# Altium PCB L-LRMAM36-FANN4-DK01_V03_位号图.PcbDoc (part 1 of 3)
Units mm, origin at the board's own origin, x right, y up, seen from the top; angles counter-clockwise.
Board outline 54 x 90 mm, 4 copper layers (Top Layer, GND, VCC, Bottom Layer), stack 1.59 mm thick; 276 components, 168 nets, 833 pads, 804 vias.
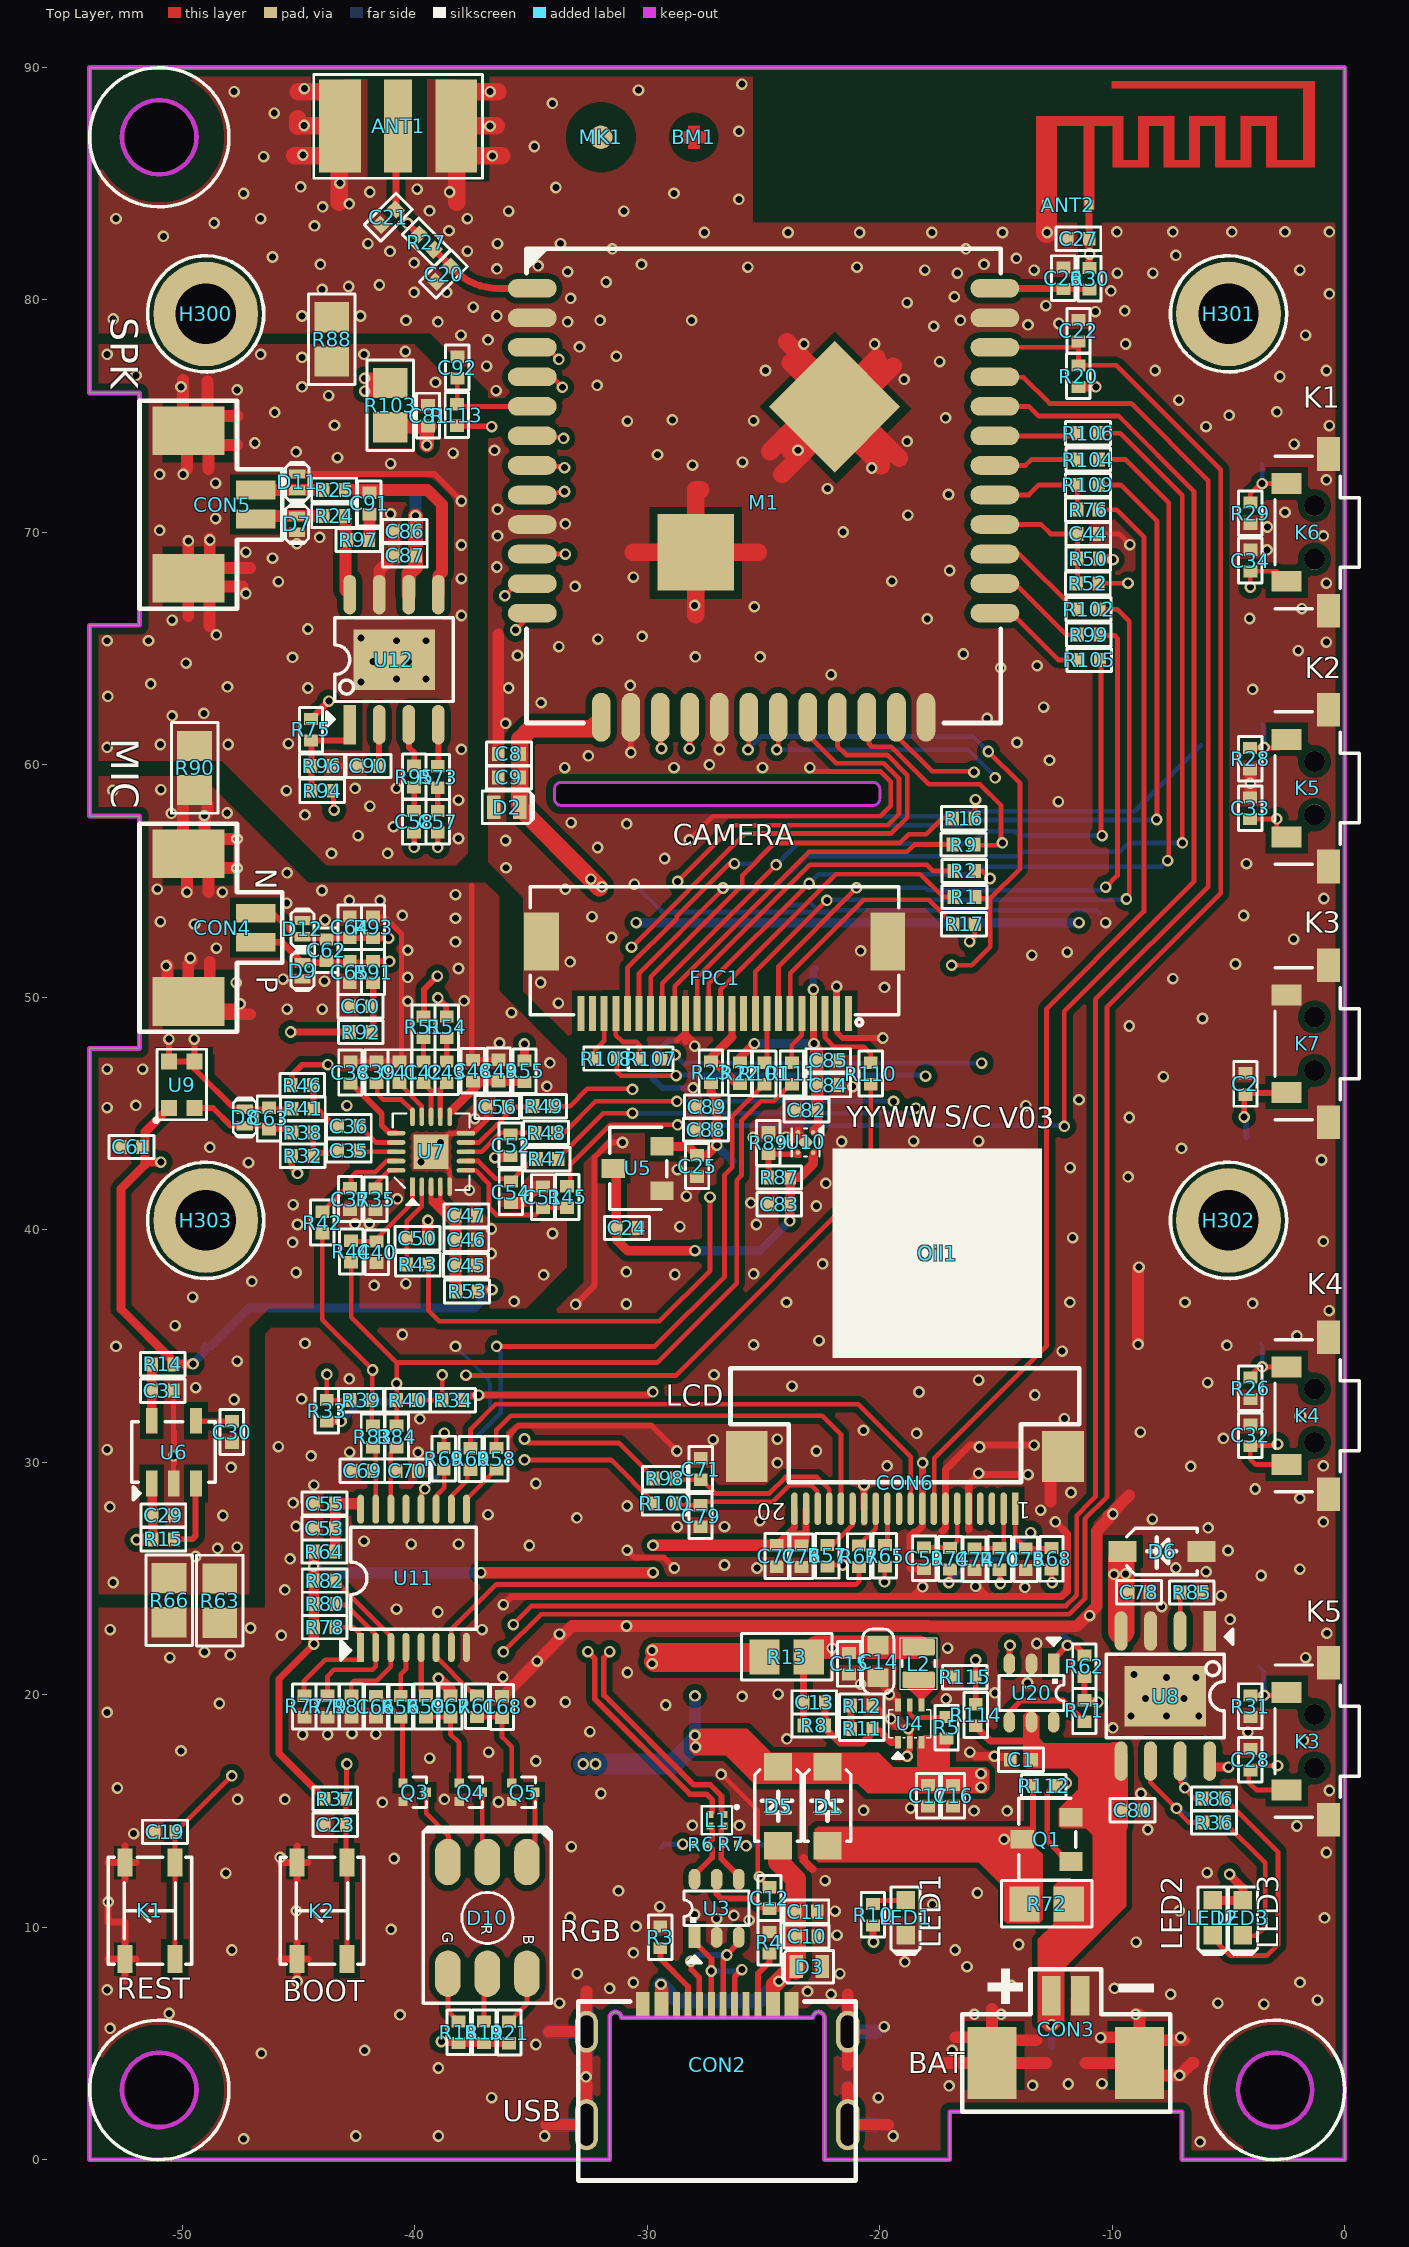
[diagram p0: Top Layer view]
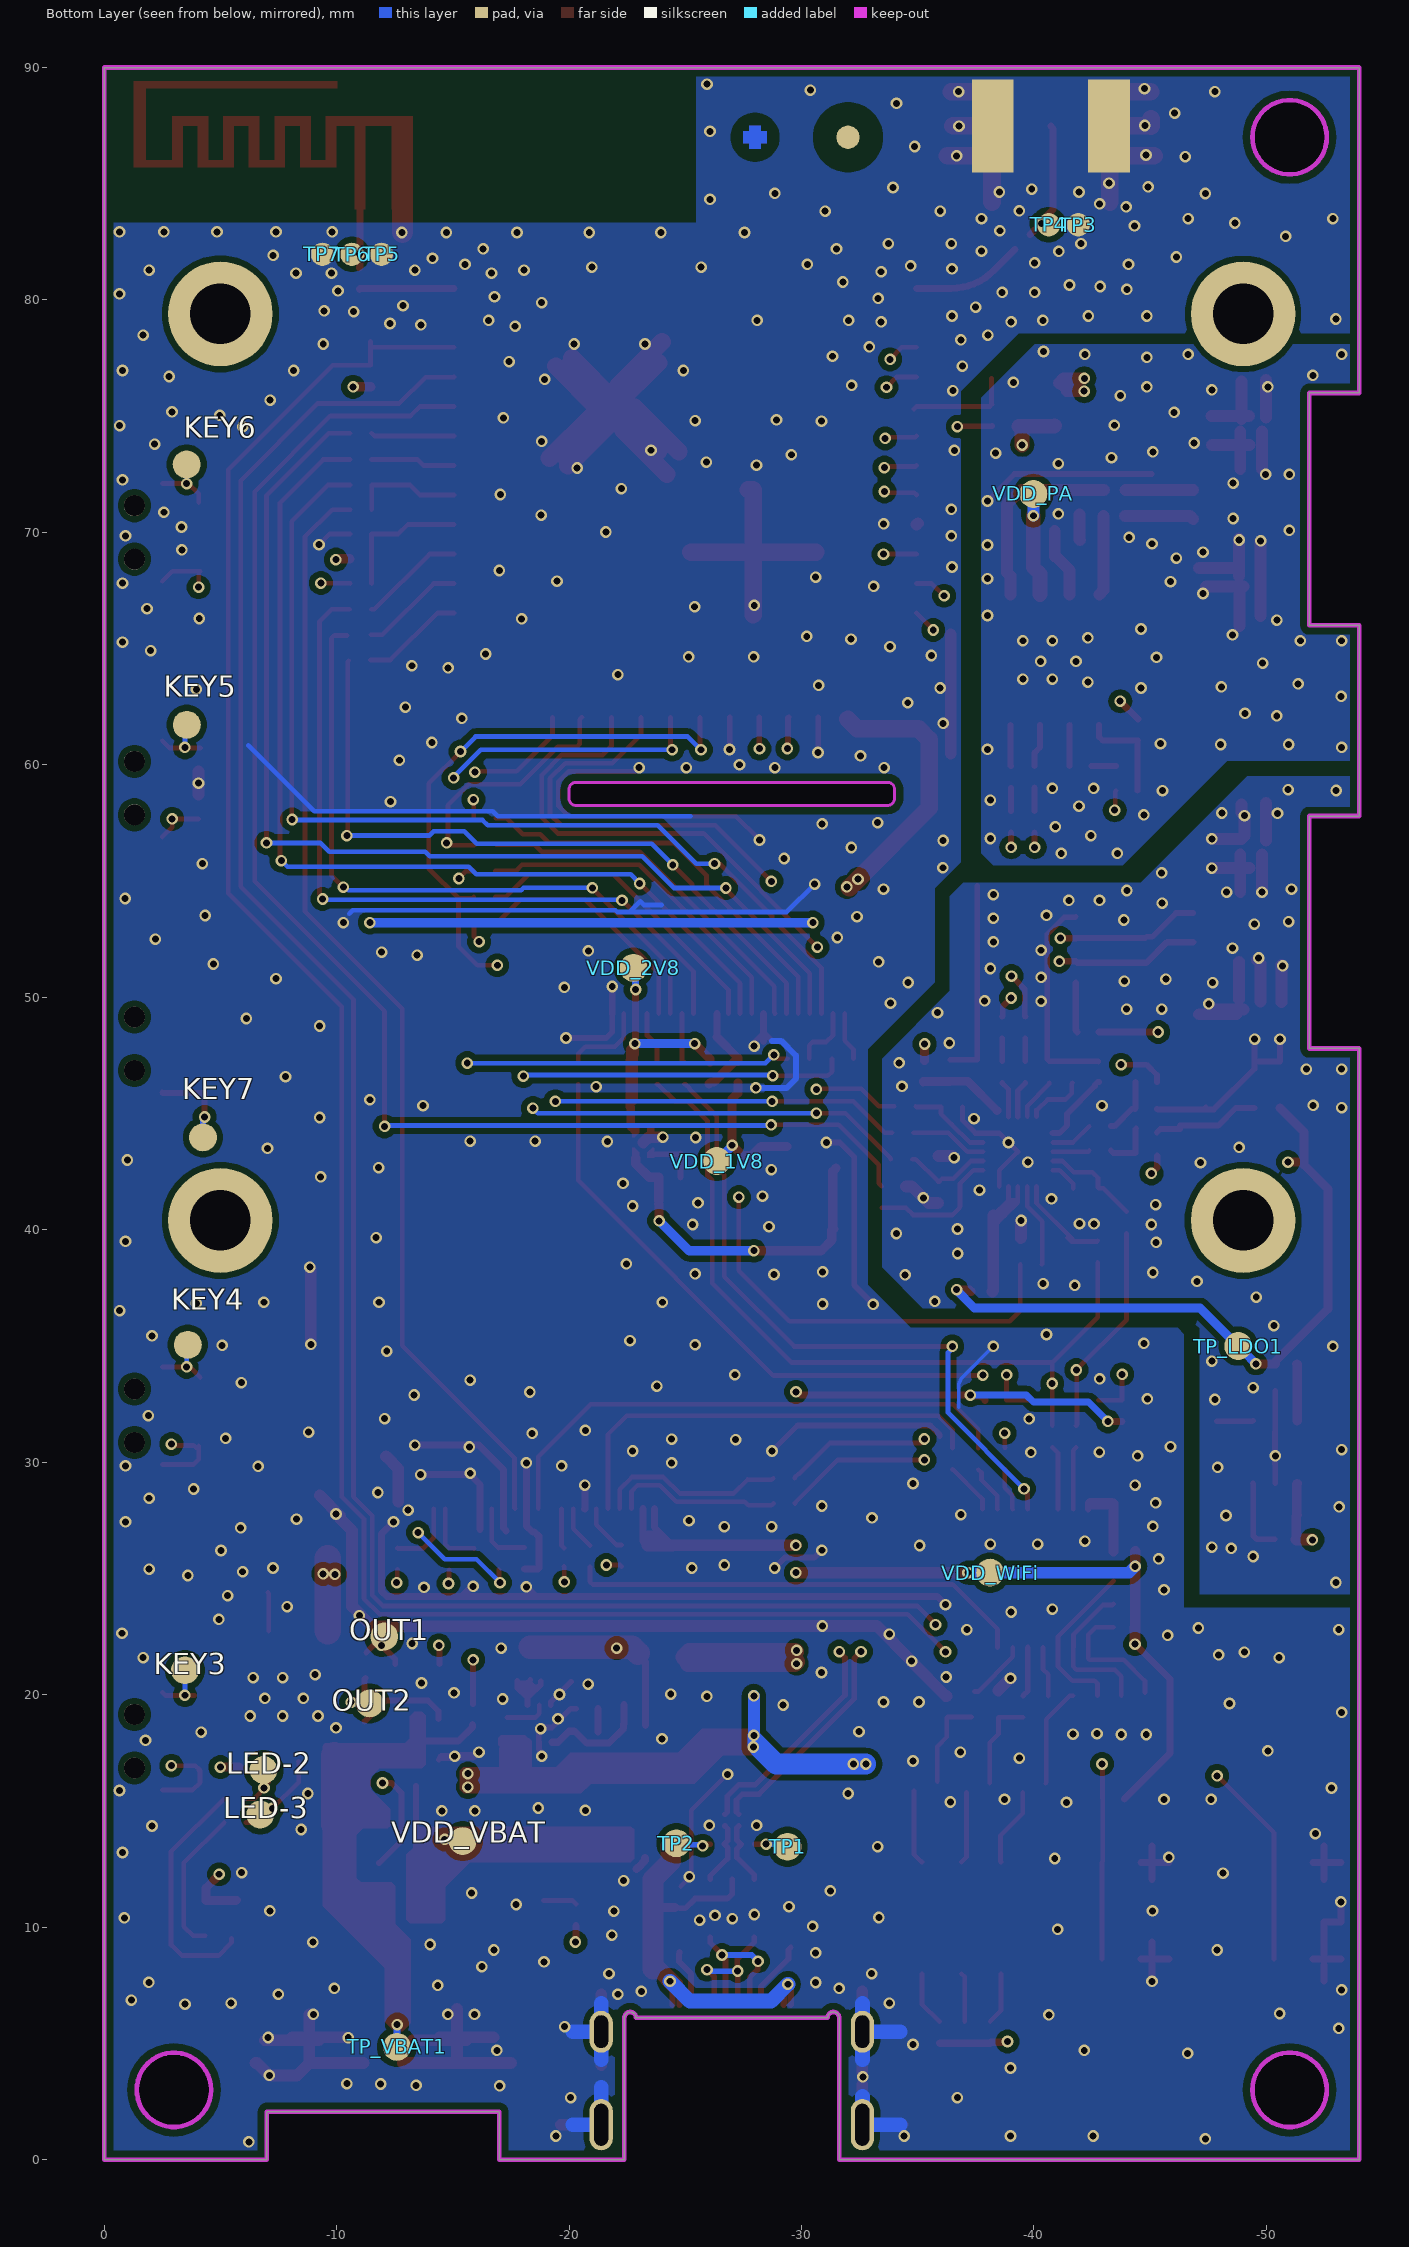
[diagram p1: Bottom Layer view, seen from below]
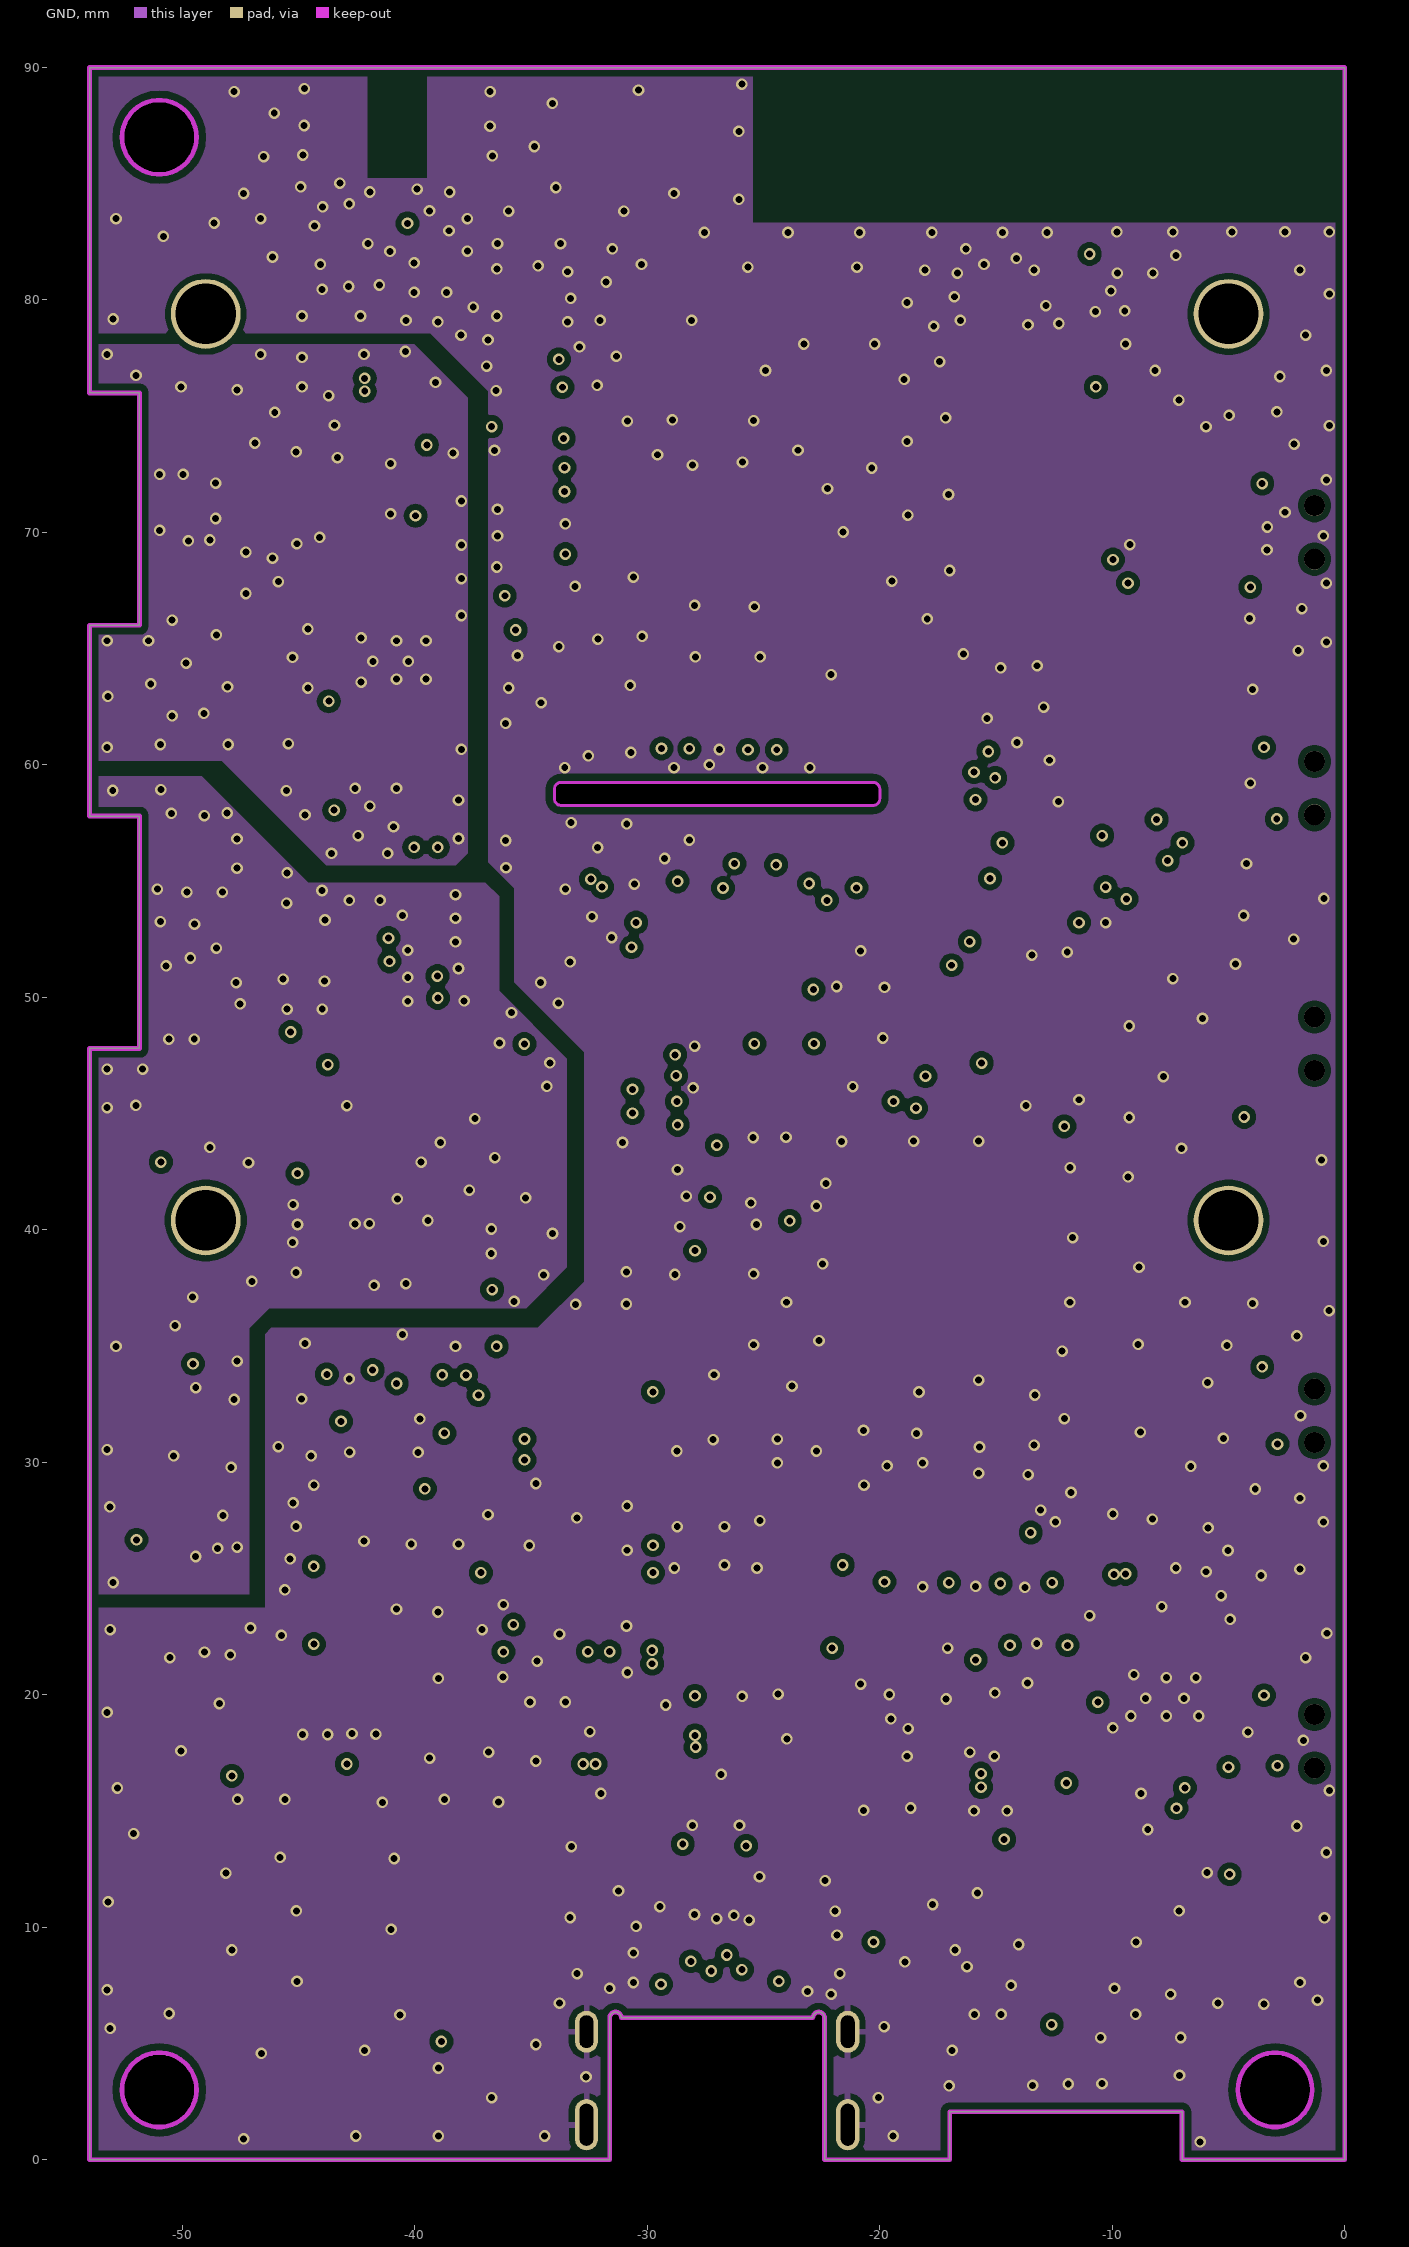
[diagram p2: GND]
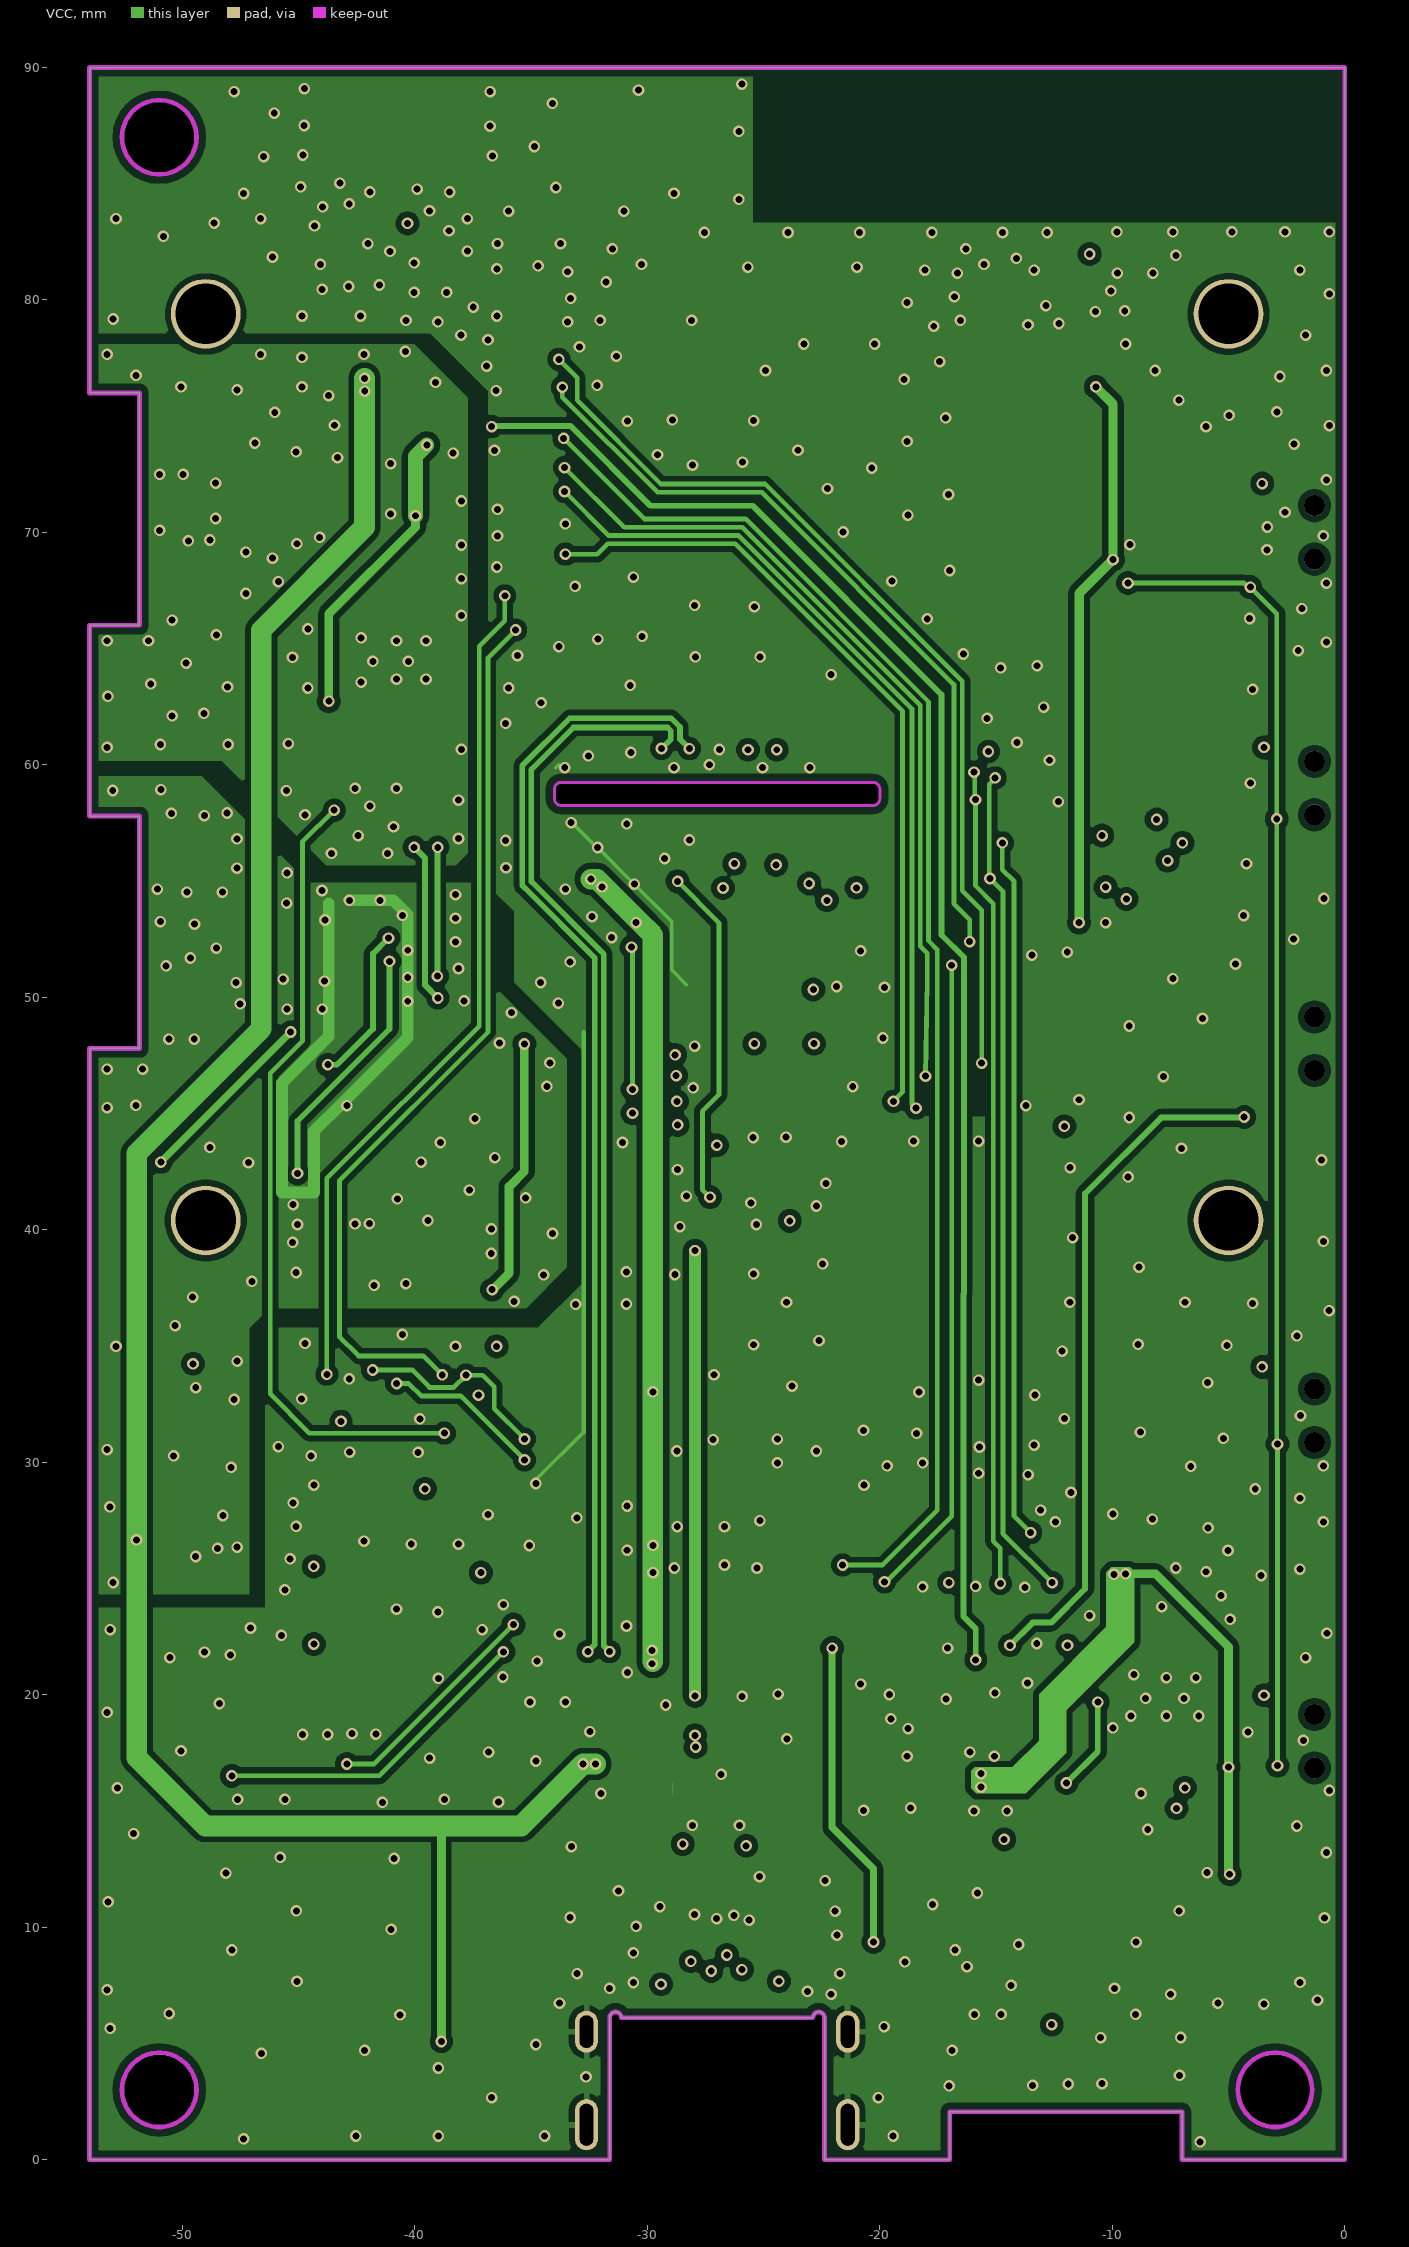
[diagram p3: VCC]
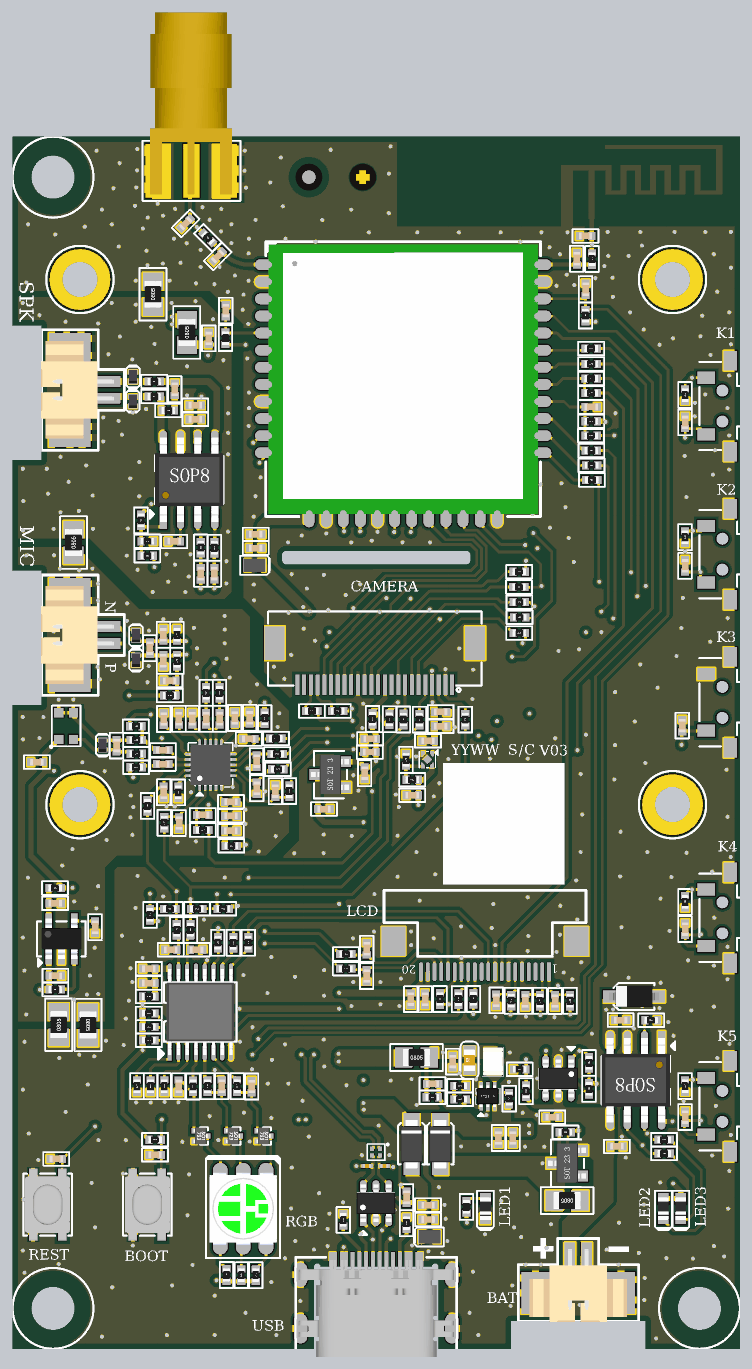
[diagram p6: 3D render of the assembled board from above, using the file's embedded part models]

## Layer stack, top to bottom
Top Solder: solder mask 0.0102, Solder Resist, Dk 3.5
Top Layer: signal copper 0.035
Dielectric 2: prepreg 0.21, PP-006, Dk 4.1
GND: signal copper 0.018
Dielectric 1: dielectric 1.064, FR-4, Dk 4.8
VCC: signal copper 0.018
Dielectric 3: prepreg 0.21, PP-006, Dk 4.1
Bottom Layer: signal copper 0.035
Bottom Solder: solder mask 0.0102, Solder Resist, Dk 3.5

## Board outline
-54,47.8 -51.85,47.8 -51.85,57.8 -54,57.8 -54,66 -51.85,66 -51.85,76 -54,76 -54,90 0,90 0,0 -7,0 -7,2.05 -17,2.05 -17,0 -22.38,0 -22.38,6.1 ccw(c-22.63,6.1) -22.88,6.1 -31.12,6.1 ccw(c-31.37,6.1) -31.62,6.1 -31.62,0 -54,0
cut-out: -33.7,58.25 cw(c-33.7,58.55) -34,58.55 -34,58.95 cw(c-33.7,58.95) -33.7,59.25 -20.3,59.25 cw(c-20.3,58.95) -20,58.95 -20,58.55 cw(c-20.3,58.55) -20.3,58.25
cut-out: -3,1.4 ccw(c-3,3) -1.4,3 ccw(c-3,3) -3,4.6 ccw(c-3,3) -4.6,3 ccw(c-3,3)
cut-out: -51,85.4 cw(c-51,87) -52.6,87 cw(c-51,87) -51,88.6 cw(c-51,87) -49.4,87 cw(c-51,87)
cut-out: -51,1.4 cw(c-51,3) -52.6,3 cw(c-51,3) -51,4.6 cw(c-51,3) -49.4,3 cw(c-51,3)

## Design rules (kind name [scope] priority, off if disabled: settings)
Clearance Clearance_via [IsVia vs IsVia] p1: gap=0.4 ignorepadtopadclearanceinfootprint=FALSE
Clearance Clearance_keepout [IsKeepOut] p2: gap=0.3 ignorepadtopadclearanceinfootprint=FALSE
Clearance Clearance_polygon [InPolygon] p3: gap=0.254 ignorepadtopadclearanceinfootprint=FALSE
Clearance Clearance_1 [InComponent('U10') or InComponent('K1')or InComponent('K2')] p4: gap=0.152 ignorepadtopadclearanceinfootprint=FALSE
Clearance [All] p5: gap=0.152 ignorepadtopadclearanceinfootprint=FALSE except(0.203: Arc-Fill Arc-Poly Arc-Region Track-Fill Track-Poly Track-Region SMDPad-Fill SMDPad-Poly SMDPad-Region THPad-Fill THPad-Poly THPad-Region Via-Fill Via-Poly Via-Region Fill-Fill Fill-Poly Fill-Region Poly-Poly Poly-Region Region-Region)
ComponentClearance [All] p1 off: gap=0.254 collisioncheckmode=3 verticalgap=0.254 showdistances=FALSE
DiffPairsRouting [All] p1: maxlimit=0.254 minlimit=0.152 mostfreqgap=0.254 toplayer_minwidth=0.241 toplayer_maxwidth=0.381 toplayer_prefwidth=0.381 midlayer1_minwidth=0.191 midlayer1_maxwidth=0.381 midlayer1_prefwidth=0.381 midlayer2_minwidth=0.191 midlayer2_maxwidth=0.381 midlayer2_prefwidth=0.381 bottomlayer_minwidth=0.241 bottomlayer_maxwidth=0.381 bottomlayer_prefwidth=0.381 maxuncoupledlength=12.7
Height [All] p1 off: minheight=0 maxheight=25.4 prefheight=12.7
HoleSize [All] p1: absolutevalues=TRUE maxlimit=5 minlimit=0.025 maxpercent=80.000 minpercent=20.000
HoleToHoleClearance [All] p1: gap=0.05 allowstackedmicrovias=TRUE
LayerPairs [All] p1 off: enforce=TRUE
MinimumSolderMaskSliver [All] p1 off: minsoldermaskwidth=0
PolygonConnect [All] p1: thpad.connectstyle=Relief thpad.reliefconductorwidth=0.254 thpad.reliefentries=4 thpad.polygonreliefangle="90 Angle" thpad.airgapwidth=0.254 smdpad.connectstyle=Direct smdpad.reliefconductorwidth=0.254 smdpad.reliefentries=4 smdpad.polygonreliefangle="90 Angle" smdpad.airgapwidth=0.254 via.connectstyle=Direct via.reliefconductorwidth=0.254 via.reliefentries=4 via.polygonreliefangle="90 Angle" via.airgapwidth=0.254
RoutingVias [All] p1: holewidth=0.3 width=0.5 viastyle="Through Hole" minholewidth=0.3 minwidth=0.5 maxholewidth=3 maxwidth=5
SilkToSilkClearance [All] p1 off: silktosilkclearance=0
SilkToSolderMaskClearance [IsPad] p1 off: minsilkscreentomaskgap=0 clearancetoexposedcopper=TRUE
SolderMaskExpansion [All] p1: expansion=0.102 istentingtop=FALSE
SupplyNets "Schematic Supply Nets_9" [InNet('VDD_VBAT')] p1: voltage=0.000
SupplyNets "Schematic Supply Nets_14" [InNet('VCC_IO')] p2: voltage=0.000
SupplyNets "Schematic Supply Nets_13" [InNet('VCC_1V8')] p3: voltage=0.000
SupplyNets "Schematic Supply Nets_11" [InNet('3.3V_8311')] p4: voltage=0.000
SupplyNets "Schematic Supply Nets_10" [InNet('PAGND')] p5: voltage=0.000
SupplyNets "Schematic Supply Nets_8" [InNet('VCC_2V8')] p6: voltage=0.000
SupplyNets "Schematic Supply Nets_7" [InNet('VBAT_Li')] p7: voltage=0.000
SupplyNets "Schematic Supply Nets_6" [InNet('GND')] p8: voltage=0.000
SupplyNets "Schematic Supply Nets_5" [InNet('VDD_PA')] p9: voltage=0.000
SupplyNets "Schematic Supply Nets_4" [InNet('V3P3')] p10: voltage=0.000
SupplyNets "Schematic Supply Nets_3" [InNet('MIC_N')] p11: voltage=0.000
SupplyNets "Schematic Supply Nets_2" [InNet('VDD_3V3')] p12: voltage=0.000
SupplyNets "Schematic Supply Nets_1" [InNet('V5P0')] p13: voltage=0.000
SupplyNets "Schematic Supply Nets" [InNet('VBUS2')] p14: voltage=0.000
UnRoutedNet [All] p1: checkbadconnections=TRUE
Width [All] p1: maxlimit=3.81 minlimit=0.152 preferedwidth=0.254
20 further rules are at their usual default settings.

## Classes and differential pairs
component class 06_LCD&Camera_interface: C59 C71 C74 C75 C76 C77 C79 C84 C85 C88 C89 CON6 FPC1 R22 R23 R98 R100 R110 R111
component class 05_Codec&PA: C35 C36 C37 C38 C39 C40 C41 C42 C43 C44 C45 C46 C47 C48 C49 C50 C51 C52 C53 C54 C55 C56 C57 C58 C60 C61 C62 C63 C64 C65 C69 C70 C86 C87 C90 C91 C92 CON4 CON5 D7 D8 D9 D11 D12 R1 R2 R9 R16 R17 R24 R25 R32 R33 R34 R35 R38 R39 R40 R41 R42 R43 R44 R45 R46 R47 R48 R49 R50 R51 R52 R53 R54 R55 R57 R58 R60 R63 R64 R65 R66 R67 R68 R69 R70 R73 R74 R75 R76 R77 R78 R79 R80 R81 R82 R83 R84 R88 R90 R91 R92 R93 R94 R95 R96 R97 R99 R101 R102 R104 R105 R106 R107 R108 R109 R113 U7 U9 U11 U12
component class 04_Function_260316_V02: ANT1 ANT2 BM1 C2 C8 C9 C19 C20 C21 C22 C23 C26 C27 C28 C32 C33 C34 C66 C67 C68 D2 D10 K1 K2 K3 K4 K5 K6 K7 KEY3 KEY4 KEY5 KEY6 KEY7 L1 M1 MK1 Oil1 Q3 Q4 Q5 R6 R7 R18 R19 R20 R21 R26 R27 R28 R29 R30 R31 R37 R56 R59 R61 TP1 TP2 TP3 TP4 TP5 TP6 TP7
component class 03_Power_260316_V02: C1 C10 C11 C12 C13 C14 C15 C16 C17 C24 C25 C29 C30 C31 C78 C80 C81 C82 C83 CON2 CON3 D1 D3 D5 D6 H300 H301 H302 H303 L2 LED1 LED2 LED3 LED-2 LED-3 OUT1 OUT2 Q1 R3 R4 R5 R8 R10 R11 R12 R13 R14 R15 R36 R62 R71 R72 R85 R86 R87 R89 R103 R112 R114 R115 TP_LDO1 TP_VBAT1 U3 U4 U5 U6 U8 U10 U20 VDD_1V8 VDD_2V8 VDD_PA VDD_VBAT VDD_WiFi
differential pair USB2: +USB2_P -USB2_N
differential pair D2: +D2_P -D2_N
differential pair AM36_USBD: +AM36_USBD_P -AM36_USBD_N

## Components (designator, comment, footprint, x,y, rotation, side; value= is the part's Value field where it differs from the comment)
ANT1 "ANT P5" SMA-SMD -40.725,87.475 r0 top
ANT2 "ANT 2P" 2.4G_5.5X12 -11,84.1 r0 top locked
BM1 "BadMARK" "Bad Mark" -28,87 r0 top
C1 "2.2uF" 0402C_0.4D -13.925,17.2 r0 top
C2 "NC" 0402C_0.4D -4.275,46.275 r270 top
C8 "10uF/16V" 0402C_0.4D -35.955,60.475 r0 top value=0.1uF
C9 "0.1uF/16V" 0402C_0.4D -35.955,59.459 r0 top
C10 "4.7uF/16V" 0402C_0.4D -23.15,9.6 r180 top
C11 "0.1uF/16V" 0402C_0.4D -23.159,10.668 r180 top
C12 "0.1uF" 0402C_0.4D -24.75,11.25 r270 top
C13 "20pF" 0402C_0.4D -22.821,19.67 r180 top
C14 "22uF" 0603C_0.6D -20.075,21.425 r90 top
C15 "10uF/10V" 0402C_0.4D -21.325,21.325 r90 top
C16 "4.7uF/16V" 0402C_0.4D -16.85,15.65 r90 top
C17 "1uF/16V" 0402C_0.4D -17.925,15.65 r90 top
C19 "100pF" 0402C_0.4D -50.755,14.097 r0 top
C20 "NC" 0402C_0.4D -38.768,81.11 r45 top
C21 "NC" 0402C_0.4D -41.147,83.561 r45 top
C22 "1uF/16V" 0402C_0.4D -11.456,78.676 r270 top
C23 "100pF" 0402C_0.4D -43.425,14.4 r0 top
C24 "1uF/16V" 0402C_0.4D -30.88,40.077 r180 top
C25 "1uF/16V" 0402C_0.4D -27.86,42.74 r90 top
C26 "NC" 0402C_0.4D -12.108,80.94 r270 top
C27 "NC" 0402C_0.4D -11.458,82.633 r0 top
C28 "100pF" 0402C_0.4D -4.064,17.201 r270 top
C29 "1uF/16V" 0402C_0.4D -50.822,27.709 r180 top
C30 "10nF" 0402C_0.4D -47.879,31.299 r90 top
C31 "1uF/16V" 0402C_0.4D -50.845,33.078 r180 top
C32 "100pF" 0402C_0.4D -4.064,31.162 r270 top
C33 "100pF" 0402C_0.4D -4.068,58.137 r270 top
C34 "100pF" 0402C_0.4D -4.064,68.788 r270 top
C35 "2.2uF/10V" 0402C_0.4D -42.843,43.407 r180 top
C36 "2.2uF/10V" 0402C_0.4D -42.843,44.457 r180 top
C37 "22pF" 0402C_0.4D -42.786,41.323 r90 top
C38 "1uF/16V" 0402C_0.4D -42.778,46.763 r270 top
C39 "1uF/16V" 0402C_0.4D -41.656,46.782 r270 top
C40 "22pF" 0402C_0.4D -41.645,39.036 r90 top
C41 "1uF/16V" 0402C_0.4D -40.656,46.782 r270 top
C42 "1uF/16V" 0402C_0.4D -39.631,46.782 r270 top
C43 "1uF/16V" 0402C_0.4D -38.631,46.782 r270 top
C44 "0.1uF/16V" 0402C_0.4D -11.037,69.933 r0 top
C45 "2.2uF" 0402C_0.4D -37.802,38.473 r180 top
C46 "0.1uF" 0402C_0.4D -37.786,39.576 r180 top
C47 "0.1uF" 0402C_0.4D -37.789,40.615 r180 top
C48 "0.1uF/16V" 0402C_0.4D -37.507,46.837 r270 top
C49 "2.2uF/10V" 0402C_0.4D -36.4,46.85 r270 top
C50 "NC" 0402C_0.4D -39.891,39.638 r180 top
C51 "NC" 0402C_0.4D -34.492,41.405 r270 top
C52 "NC" 0402C_0.4D -35.886,43.635 r90 top
C53 "2.2uF/10V" 0402C_0.4D -43.891,27.158 r0 top
C54 "NC" 0402C_0.4D -35.873,41.615 r90 top
C55 "0.1uF/16V" 0402C_0.4D -43.887,28.223 r0 top
C56 "NC" 0402C_0.4D -36.461,45.283 r0 top
C57 "0.47uF" 0402C_0.4D -39.019,57.552 r90 top
C58 "0.47uF" 0402C_0.4D -40.032,57.546 r90 top
C59 "NC" 0402C_0.4D -18.094,25.871 r270 top
C60 "0.1uF/16V" 0402C_0.4D -42.343,49.615 r180 top
C61 "0.1uF/16V" 0402C_0.4D -52.197,43.561 r0 top
C62 "33pF" 0402C_0.4D -43.811,52.025 r270 top
C63 "15pF" 0402C_0.4D -46.283,44.789 r270 top
C64 "1nF" 0402C_0.4D -42.803,53.012 r270 top
C65 "1nF" 0402C_0.4D -42.803,51.087 r90 top
C66 "100pF" 0402C_0.4D -41.676,19.485 r90 top
C67 "100pF" 0402C_0.4D -38.473,19.494 r270 top
C68 "100pF" 0402C_0.4D -36.252,19.472 r270 top
C69 "22pF" 0402C_0.4D -42.261,29.63 r180 top
C70 "22pF" 0402C_0.4D -40.336,29.63 r180 top
C71 "22pF" 0402C_0.4D -27.705,29.705 r90 top
C74 "NC" 0402C_0.4D -15.926,25.83 r270 top
C75 "NC" 0402C_0.4D -13.724,25.827 r270 top
C76 "1uF/16V" 0402C_0.4D -23.368,25.954 r270 top
C77 "1uF/16V" 0402C_0.4D -24.436,25.965 r270 top
C78 "CAP-NP" 0402C_0.4D -8.854,24.409 r180 top
C79 "22pF" 0402C_0.4D -27.713,27.683 r90 top
C80 "CAP-NP" 0402C_0.4D -9.128,15.028 r180 top
C81 "10uF/10V" 0402C_0.4D -39.436,75.024 r270 top
C82 "1uF/16V" 0402C_0.4D -23.156,45.142 r0 top
C83 "2.2uF" 0402C_0.4D -24.325,41.101 r0 top
C84 "1uF/16V" 0402C_0.4D -22.22,46.222 r0 top
C85 "0.1uF/16V" 0402C_0.4D -22.22,47.287 r180 top
C86 "10uF/10V" 0402C_0.4D -40.435,70.057 r180 top
C87 "0.1uF/16V" 0402C_0.4D -40.432,69.015 r180 top
C88 "1uF/16V" 0402C_0.4D -27.482,44.312 r180 top
C89 "0.1uF/16V" 0402C_0.4D -27.446,45.29 r0 top
C90 "1uF/16V" 0402C_0.4D -42,59.951 r180 top
C91 "1nF" 0402C_0.4D -41.961,71.246 r270 top
C92 "0.1uF/16V" 0402C_0.4D -38.176,77.091 r90 top
CON2 "USB-TYPE C-16" USB-TYPEC-U22401-1 -27,3 r0 top locked
CON3 "FPC-2" SMD-1.25-2P -12,5.6 r0 top
CON4 "FPC-2" SMD-1.25-2P -48.3,53 r270 top locked
CON5 "11-0672002-33C" SMD-1.25-2P -48.3,71.2 r270 top locked
CON6 "HW0520010-202R-001" FPC0.5E-20P -23.675,27.998 r0 top locked
D1 "DIODE-ZD" SOD-123-FL -22.25,15.2 r270 top
D2 "DIODE-TVS" UDFN2(1610) -36.056,58.178 r180 top
D3 "DIODE-TVS" UDFN2(1610) -23.043,8.301 r0 top
D5 "DIODE-ZD" SOD-123-FL -24.375,15.2 r270 top
D6 "DIODE-ZD" SOD-123 -7.854,26.162 r0 top
D7 "DIODE-2TVS" DFN1006-NP -45.077,70.358 r90 top
D8 "WS6183KF" DFN1006-NP -47.317,44.83 r90 top
D9 "DIODE-2TVS" DFN1006-NP -44.839,51.139 r90 top
D10 "MHP5050DRGBCT" D5050-RGB -36.882,10.4 r270 top locked
D11 "DIODE-2TVS" DFN1006-NP -45.063,72.161 r90 top
D12 "DIODE-2TVS" DFN1006-NP -44.839,52.957 r90 top
FPC1 "HW0520010-242R-001" FPC0.5-24P -27.108,52 r0 top locked
H300 "TP" M2.5 -49,79.4 r0 top
H301 "TP" M2.5 -5,79.4 r0 top
H302 "TP" M2.5 -5,40.4 r0 top locked
H303 "TP" M2.5 -49,40.4 r0 top locked
K1 "BUTTON-4" SW-4.2X3.2-4P-S -51.4,10.7 r90 top
K2 "BUTTON-4" SW-4.2X3.2-4P-S -44,10.7 r90 top
K3 "BUTTON-2-2" 1188E-1W3-V-T/R -1.6,18 r90 top locked
K4 "BUTTON-2-2" 1188E-1W3-V-T/R -1.6,32 r90 top locked
K5 "BUTTON-2-2" 1188E-1W3-V-T/R -1.6,59 r90 top
K6 "BUTTON-2-2" 1188E-1W3-V-T/R -1.6,70 r90 top
K7 "BUTTON-2-2" 1188E-1W3-V-T/R -1.6,48 r90 top
KEY3 "MARK" TEST#1 -3.475,21.05 r90 bottom
KEY4 "MARK" TEST#1 -3.6,35.05 r90 bottom
KEY5 "MARK" TEST#1 -3.556,61.722 r90 bottom
KEY6 "MARK" TEST#1 -3.55,72.925 r90 bottom
KEY7 "MARK" TEST#1 -4.25,43.975 r90 bottom
L1 "DLM0NSN900HY2D" L-0.85X0.65 -27.007,14.601 r270 top
L2 "2.2uH/20%/2.0*1.2*0.8/1.7A/146mΩ" 0805L_0.7D-NB -18.336,21.338 r90 top
LED1 "*" D0603 -18.893,10.4 r90 top
LED2 "红/25mA" D0603 -5.682,10.4 r90 top
LED3 "绿/25mA" D0603 -4.382,10.4 r90 top
LED-2 "MARK" TEST#1 -6.858,16.764 r90 bottom
LED-3 "MARK" TEST#1 -6.713,14.841 r90 bottom
M1 "L-LRMAM36-FANN4" L-LRMAM36-FANN4 -25,72 r0 top locked
MK1 "MARK" MARK -32,87 r0 top
Oil1 "Oil" "White oil-9X9" -17.526,38.989 r0 top
OUT1 "MARK" TEST#1 -12.05,22.5 r90 bottom
OUT2 "MARK" TEST#1 -11.425,19.625 r90 bottom
Q1 "P-MOS-D1" SOT-23-3G -12.825,13.775 r0 top
Q3 "NPN" SOT-723-3A -40.013,15.8 r180 top
Q4 "NPN" SOT-723-3A -37.6,15.8 r180 top
Q5 "NPN" SOT-723-3A -35.337,15.8 r180 top
R1 "0Ω/1%" 0402R_0.4D -16.359,54.315 r0 top
R2 "0Ω/1%" 0402R_0.4D -16.367,55.437 r0 top
R3 "5.1K/1%" 0402R_0.4D -29.446,9.566 r270 top
R4 "5.1K/1%" 0402R_0.4D -24.75,9.325 r270 top
R5 "51KΩ/1%" 0402R_0.4D -17.128,18.574 r270 top
R6 "RES-NBOM" 0201_0.25D -27.684,13.561 r180 top
R7 "RES-NBOM" 0201_0.25D -26.4,13.575 r180 top
R8 "100KΩ/1%" 0402R_0.4D -22.825,18.675 r180 top
R9 "0Ω/1%" 0402R_0.4D -16.401,56.571 r0 top
R10 "620R" 0402R_0.4D -20.299,10.535 r270 top
R11 "22KΩ" 0402R_0.4D -20.775,18.525 r0 top
R12 "220Ω/1%" 0402R_0.4D -20.775,19.525 r180 top
R13 "RES" 0805R_0.6D -24.007,21.625 r0 top
R14 "0Ω/1%" 0402R_0.4D -50.853,34.213 r0 top
R15 "10KΩ/5%" 0402R_0.4D -50.822,26.684 r180 top
R16 "0Ω/1%" 0402R_0.4D -16.388,57.7 r0 top
R17 "0Ω/1%" 0402R_0.4D -16.377,53.143 r0 top
R18 "620R" 0402R_0.4D -38.122,5.478 r270 top
R19 "620R" 0402R_0.4D -37.025,5.472 r270 top
R20 "10KΩ/5%" 0402R_0.4D -11.463,76.724 r270 top
R21 "620R" 0402R_0.4D -35.945,5.467 r270 top
R22 "0Ω/1%" 0402R_0.4D -26.022,46.738 r90 top
R23 "0Ω/1%" 0402R_0.4D -27.27,46.77 r270 top
R24 "1.5Ω/1%" 0402R_0.4D -43.477,70.71 r180 top
R25 "1.5Ω/1%" 0402R_0.4D -43.477,71.83 r180 top
R26 "27KΩ/1%" 0402R_0.4D -4.064,33.184 r90 top
R27 "0Ω/1%" 0402R_0.4D -39.51,82.489 r135 top
R28 "10KΩ/1%" 0402R_0.4D -4.068,60.26 r270 top
R29 "3.3KΩ/1%" 0402R_0.4D -4.064,70.821 r90 top
R30 "0Ω/1%" 0402R_0.4D -10.977,80.917 r90 top
R31 "5.1KΩ/1%" 0402R_0.4D -4.064,19.506 r90 top
R32 "0Ω/1%" 0402R_0.4D -44.831,43.18 r180 top
R33 "2.2KΩ" 0402R_0.4D -43.793,32.215 r270 top
R34 "2.2KΩ" 0402R_0.4D -38.359,32.668 r0 top
R35 "10KΩ/1%" 0402R_0.4D -41.696,41.314 r90 top
R36 "RES" 0402R_0.4D -5.625,14.5 r0 top
R37 "10KΩ/1%" 0402R_0.4D -43.427,15.523 r0 top
R38 "0Ω/1%" 0402R_0.4D -44.82,44.181 r180 top
R39 "0Ω/1%" 0402R_0.4D -42.317,32.668 r180 top
R40 "0Ω/1%" 0402R_0.4D -40.316,32.668 r0 top
R41 "0Ω/1%" 0402R_0.4D -44.82,45.206 r180 top
R42 "0Ω/1%" 0402R_0.4D -43.986,40.312 r90 top
R43 "0Ω/1%" 0402R_0.4D -39.875,38.513 r0 top
R44 "0Ω/1%" 0402R_0.4D -42.744,39.063 r90 top
R45 "0Ω/1%" 0402R_0.4D -33.45,41.409 r90 top
R46 "0Ω/1%" 0402R_0.4D -44.85,46.225 r0 top
R47 "0Ω/1%" 0402R_0.4D -34.3,43.035 r0 top
R48 "0Ω/1%" 0402R_0.4D -34.355,44.169 r0 top
R49 "0Ω/1%" 0402R_0.4D -34.448,45.316 r0 top
R50 "10KΩ/1%" 0402R_0.4D -11.037,68.871 r0 top
R51 "0Ω/1%" 0402R_0.4D -39.631,48.707 r90 top
R52 "0Ω/1%" 0402R_0.4D -11.051,67.803 r180 top
R53 "0Ω/1%" 0402R_0.4D -37.758,37.347 r180 top
R54 "0Ω/1%" 0402R_0.4D -38.631,48.707 r90 top
R55 "0Ω/1%" 0402R_0.4D -35.284,46.817 r90 top
R56 "0Ω/1%" 0402R_0.4D -40.61,19.478 r270 top
R57 "0Ω/1%" 0402R_0.4D -22.261,25.972 r270 top
R58 "0Ω/1%" 0402R_0.4D -36.5,30.154 r270 top
R59 "0Ω/1%" 0402R_0.4D -39.531,19.494 r270 top
R60 "0Ω/1%" 0402R_0.4D -37.609,30.141 r270 top
R61 "0Ω/1%" 0402R_0.4D -37.329,19.501 r270 top
R62 "0Ω/1%" 0402R_0.4D -11.2,21.225 r90 top
R63 "RES" 0805R_0.6D -48.399,24.047 r270 top
R64 "0Ω/1%" 0402R_0.4D -43.891,26.158 r180 top
R65 "0Ω/1%" 0402R_0.4D -19.784,25.975 r270 top
R66 "RES" 0805R_0.6D -50.577,24.066 r90 top
R67 "0Ω/1%" 0402R_0.4D -20.899,25.959 r270 top
R68 "0Ω/1%" 0402R_0.4D -12.615,25.843 r270 top
R69 "0Ω/1%" 0402R_0.4D -38.761,30.155 r270 top
R70 "0Ω/1%" 0402R_0.4D -14.848,25.836 r270 top
R71 "0Ω/1%" 0402R_0.4D -11.2,19.3 r90 top
R72 "RES" 0805R_0.6D -12.825,11 r180 top
R73 "68KΩ/1%" 0402R_0.4D -39.019,59.477 r90 top
R74 "0Ω/1%" 0402R_0.4D -16.976,25.846 r270 top
R75 "10KΩ/1%" 0402R_0.4D -44.472,61.512 r90 top
R76 "0Ω/1%" 0402R_0.4D -11.044,70.98 r180 top
R77 "10KΩ/1%" 0402R_0.4D -44.76,19.494 r90 top
R78 "NC" 0402R_0.4D -43.886,22.905 r180 top
R79 "10KΩ/1%" 0402R_0.4D -43.76,19.494 r90 top
R80 "NC" 0402R_0.4D -43.886,23.905 r180 top
R81 "10KΩ/1%" 0402R_0.4D -42.735,19.494 r90 top
R82 "NC" 0402R_0.4D -43.886,24.905 r180 top
R83 "0Ω/1%" 0402R_0.4D -41.811,31.105 r90 top
R84 "0Ω/1%" 0402R_0.4D -40.786,31.105 r90 top
R85 "RES" 0402R_0.4D -6.585,24.396 r180 top
R86 "RES" 0402R_0.4D -5.625,15.525 r0 top
R87 "10KΩ/5%" 0402R_0.4D -24.324,42.251 r0 top
R88 "RES" 0805R_0.6D -43.58,78.304 r90 top
R89 "10KΩ/5%" 0402R_0.4D -24.798,43.736 r270 top
R90 "RES" 0805R_0.6D -49.476,59.867 r90 top
R91 "2.2KΩ" 0402R_0.4D -41.803,51.087 r270 top
R92 "220Ω" 0402R_0.4D -42.333,48.508 r180 top
R93 "2.2KΩ" 0402R_0.4D -41.803,53.012 r270 top
R94 "0Ω/1%" 0402R_0.4D -43.991,58.886 r180 top
R95 "68KΩ/1%" 0402R_0.4D -40.032,59.496 r90 top
R96 "10KΩ/1%" 0402R_0.4D -43.999,59.957 r180 top
R97 "RES" 0402R_0.4D -42.442,69.677 r180 top
R98 "0Ω/1%" 0402R_0.4D -29.247,29.308 r0 top
R99 "0Ω/1%" 0402R_0.4D -11.014,65.6 r180 top
R100 "0Ω/1%" 0402R_0.4D -29.257,28.224 r0 top
R101 "0Ω/1%" 0402R_0.4D -24.969,46.726 r270 top
R102 "0Ω/1%" 0402R_0.4D -11.023,66.695 r180 top
R103 "RES" 0805R_0.6D -41.063,75.472 r90 top
R104 "0Ω/1%" 0402R_0.4D -11.035,73.133 r180 top
R105 "0Ω/1%" 0402R_0.4D -10.989,64.514 r180 top
R106 "0Ω/1%" 0402R_0.4D -11.042,74.269 r180 top
R107 "0Ω/1%" 0402r_0.4D -29.866,47.358 r0 top
R108 "0Ω/1%" 0402r_0.4D -31.776,47.362 r0 top
R109 "0Ω/1%" 0402R_0.4D -11.048,72.041 r180 top
R110 "0Ω/1%" 0402R_0.4D -20.391,46.722 r90 top
R111 "0Ω/1%" 0402R_0.4D -23.786,46.722 r90 top
R112 "NC" 0402R_0.4D -12.95,16.075 r0 top
R113 "0Ω/1%" 0402R_0.4D -38.197,75.049 r90 top
R114 "1MΩ/1%" 0402R_0.4D -15.875,19.125 r270 top
R115 "1MΩ/1%" 0402R_0.4D -16.35,20.75 r0 top
TP1 "DP" TEST#1 -29.4,13.458 r270 bottom
TP2 "DM" TEST#1 -24.619,13.606 r270 bottom
TP3 "GND" TEST#2 -41.905,83.235 r180 bottom
TP4 "LoRa" TEST#2 -40.635,83.235 r225 bottom
TP5 "GND" TEST#2 -11.932,81.964 r90 bottom
TP6 "WiFi" TEST#2 -10.662,81.964 r90 bottom
TP7 "GND" TEST#2 -9.392,81.964 r90 bottom
TP_LDO1 "TP" TEST#1 -48.787,34.997 r270 bottom
TP_VBAT1 "TP" TEST#1 -12.593,4.85 r90 bottom
U3 "USBLC6-2SC6" SOT-23-6P -27.021,10.811 r270 top
U4 "SGM61020XKB6G/TR" SOT-563-6 -18.714,18.752 r0 top
U5 "LDO-1G2OUT3IN" SOT-23-3P -30.42,42.637 r0 top
U6 "SGM2028-XYN5G/TR" SOT-23-5P -50.372,30.434 r270 top
U7 "ES8311" QFN20(0.4)-3X3 -39.306,43.356 r90 top
U8 "TP4056" SOP-8(1.27)-GND -7.717,19.939 r180 top
U9 "MSM381ACT001" 麦克风MSM381ACT001 -50.029,46.241 r180 top locked
U10 "ETA5053V280DF1E" XDFN4-1X1 -23.196,43.754 r0 top
U11 "TPT29554A" TSSOP-16(0.65)-5X6.6 -40.061,25.005 r0 top
U12 "CST8302A" SOP-8(1.27)-GND -40.9,64.526 r0 top
U20 "EC190708-4-A427" SOT-23-6P -13.475,20.075 r90 top locked
VDD_1V8 "MARK" TEST#1 -26.354,42.957 r0 bottom
VDD_2V8 "MARK" TEST#1 -22.772,51.267 r90 bottom
VDD_PA "MARK" TEST#1 -39.974,71.655 r270 bottom
VDD_VBAT "MARK" TEST#1 -15.425,13.7 r0 bottom
VDD_WiFi "MARK" TEST#1 -38.113,25.248 r90 bottom

## Footprints (in the part's own frame and the unit in brackets; to place one, negate y for a bottom-side part, rotate by r counter-clockwise, add the part's x,y. Pads: shape width x height; smd on the part's side, far side on the other; paste and mask are expansions set on the pad)
2.4G_5.5X12 [mm]
  rect 0.4x0.4 smd paste-2 mask+0.102: 1(0,0) 2(-1.83,0)
  Top Layer region: -2.28,-0.2 -2.28,3.8 1.47,3.8 1.47,1.9 2.12,1.9 2.12,3.8 3.67,3.8 3.67,1.9 4.32,1.9 4.32,3.8 5.87,3.8 5.87,1.9 6.52,1.9 6.52,3.8 8.07,3.8 8.07,1.9 9.22,1.9 9.22,5 0.97,5 0.97,5.3 9.72,5.3 9.72,1.6 7.62,1.6 7.62,3.4 6.97,3.4 6.97,1.6 5.42,1.6 5.42,3.4 4.77,3.4 4.77,1.6 3.22,1.6 3.22,3.4 2.57,3.4 2.57,1.6 1.02,1.6 1.02,3.4 0.22,3.4 0.22,-0.2 -0.23,-0.2 -0.23,3.4 -1.38,3.4 -1.38,-0.2
0201_0.25D [mm]
  rect 0.3x0.3 smd mask+0.051: 1(-0.275,0) 2(0.275,0)
  body extent -0.3,-0.15 0.3,0.15, height 0.28
0402C_0.4D [mm]
  rect 0.525x0.6 smd: 1(-0.463,0) 2(0.463,0)
  silkscreen extent -0.96,-0.5 0.96,0.5, body extent -0.5,-0.25 0.5,0.25, height 0.48
0402R_0.4D [mm]
  rect 0.525x0.6 smd: 1(-0.463,0) 2(0.463,0)
  silkscreen extent -0.96,-0.5 0.96,0.5, body extent -0.5,-0.25 0.5,0.25, height 0.36
0402r_0.4D [mm]
  rect 0.525x0.6 smd: 1(-0.463,0) 2(0.463,0)
  silkscreen extent -0.96,-0.5 0.96,0.5, body extent -0.5,-0.25 0.5,0.25, height 0.36
0603C_0.6D [mm]
  rect 0.8x0.9 smd mask+0.076: 1(-0.7,0) 2(0.7,0)
  silkscreen extent -1.4,-0.68 1.4,0.68, body extent -0.8,-0.4 0.8,0.4, height 0.3
0805L_0.7D-NB [mm]
  rrect14% 0.7x1.4 smd mask+0.05: 1(-0.7,0) 2(0.7,0)
  silkscreen extent -1.1,-0.8 1.1,0.8, body extent -1,-0.75 1,0.75, height 1.8
0805R_0.6D [mm]
  rect 1.3x1.5 smd: 1(-0.95,0) 2(0.95,0)
  silkscreen extent -1.95,-1 1.95,1, body extent -1,-0.62 1,0.63, height 0.6
1188E-1W3-V-T/R [mm]
  rect 1.45x1 smd: 0(-3.375,-0.9) 0(3.375,-0.9)
  rect 0.9x1.3 smd: 1(2.1,0.9) 2(-2.1,0.9)
  round 0.9 hole 0.9 unplated: NC(-1.15,-0.3) NC(1.15,-0.3)
  silkscreen extent -3.28,-2.23 3.28,1.4, body extent -3.9,-2.3 3.9,1.2, height 3.48
"Bad Mark" [mm]
  round 2 on Top Solder: 2(0,0)
  round 2 on Bottom Solder: 2(0,0)
  Top Layer pour cut-out: -1.051,0 -0.971,-0.402 -0.743,-0.743 -0.402,-0.971 0,-1.051 0,-1.051 0.402,-0.971 0.743,-0.743 0.971,-0.402 1.051,0 1.051,0 0.971,0.402 0.743,0.743 0.402,0.971 0,1.051 0,1.051 -0.402,0.971 -0.743,0.743 -0.971,0.402 -1.051,0
  Top Layer region: -0.25,0.5 0.25,0.5 0.25,-0.5 -0.25,-0.5
  Top Layer region: -0.5,-0.25 -0.5,0.25 0.5,0.25 0.5,-0.25
  Bottom Layer pour cut-out: 1.051,0 0.971,-0.402 0.743,-0.743 0.402,-0.971 0,-1.051 0,-1.051 -0.402,-0.971 -0.743,-0.743 -0.971,-0.402 -1.051,0 -1.051,0 -0.971,0.402 -0.743,0.743 -0.402,0.971 0,1.051 0,1.051 0.402,0.971 0.743,0.743 0.971,0.402 1.051,0
  Bottom Layer region: 0.5,-0.25 0.5,0.25 -0.5,0.25 -0.5,-0.25
  Bottom Layer region: 0.25,0.5 -0.25,0.5 -0.25,-0.5 0.25,-0.5
D0603 [mm]
  rect 0.8x0.8 smd: A(0.75,0) K(-0.75,0)
  silkscreen extent -1.59,-0.63 1.33,0.63, body extent -0.85,-0.4 0.85,0.4, height 0.56
D5050-RGB [mm]
  oval 2x1.1 smd: 1(2.4,-1.7) 2(2.4,0) 3(2.4,1.7) 4(-2.4,1.7) 5(-2.4,0) 6(-2.4,-1.7)
  rect 0.9x0.9 on Mech3: ""(-2.2,1.7) ""(-2.2,-1.7) ""(-2.2,0) ""(2.2,1.7) ""(2.2,0) ""(2.2,-1.7)
  round 0.3 on Mech3: ""(0,0)
  silkscreen extent -3.9,-2.76 3.67,2.74, body extent -2.7,-2.5 2.7,2.5, height 2
DFN1006-NP [mm]
  rect 0.4x0.7 smd mask+0.051: A(0.35,0) K(-0.35,0)
  rect 0.25x0.5 on Mech3: ""(-0.325,0) ""(0.325,0)
  silkscreen extent -0.85,-0.5 0.85,0.5, body extent -0.5,-0.3 0.5,0.3, height 0.5
FPC0.5-24P [mm]
  rect 0.3x1.5 smd mask+0.05: 1(5.75,-2.7) 2(5.25,-2.7) 3(4.75,-2.7) 4(4.25,-2.7) 5(3.75,-2.7) 6(3.25,-2.7) 7(2.75,-2.7) 8(2.25,-2.7) 9(1.75,-2.7) 10(1.25,-2.7) 11(0.75,-2.7) 12(0.25,-2.7) 13(-0.25,-2.7) 14(-0.75,-2.7) 15(-1.25,-2.7) 16(-1.75,-2.7) 17(-2.25,-2.7) 18(-2.75,-2.7) 19(-3.25,-2.7) 20(-3.75,-2.7) 21(-4.25,-2.7) 22(-4.75,-2.7) 23(-5.25,-2.7) 24(-5.75,-2.7)
  rect 1.5x2.5 smd: 25(-7.45,0.4) 26(7.45,0.4)
  silkscreen extent -7.93,-3.22 7.93,2.75, body extent -7.8,-2.65 7.8,2.65, height 2
FPC0.5E-20P [mm]
  rect 1.8x2.2 smd mask+0.075: 0(-2.05,2.25) 0(11.55,2.25)
  rect 0.28x1.4 smd mask+0.051: 1(9.5,0)
  oval 0.28x1.4 smd mask+0.051: 2(9,0) 3(8.5,0) 4(8,0) 5(7.5,0) 6(7,0) 7(6.5,0) 8(6,0) 9(5.5,0) 10(5,0) 11(4.5,0) 12(4,0) 13(3.5,0) 14(3,0) 15(2.5,0) 16(2,0) 17(1.5,0) 18(1,0) 19(0.5,0) 20(0,0)
  silkscreen extent -2.75,1.14 12.25,6.05, body extent -2.4,0.44 11.9,6.04, height 2
L-0.85X0.65 [mm]
  rect 0.3x0.3 smd mask+0.051: 1(-0.25,0.3) 2(0.25,0.3) 3(0.25,-0.3) 4(-0.25,-0.3)
  silkscreen extent -0.63,-0.65 0.6,0.92, body extent -0.43,-0.33 0.43,0.32, height 0.45
L-LRMAM36-FANN4 [mm]
  oval 2.1x0.8 smd: 1(-9.95,8.5) 2(-9.95,7.23) 3(-9.95,5.96) 4(-9.95,4.69) 5(-9.95,3.42) 6(-9.95,2.15) 7(-9.95,0.88) 8(-9.95,-0.39) 9(-9.95,-1.66) 10(-9.95,-2.93) 11(-9.95,-4.2) 12(-9.95,-5.47) 25(9.95,-5.47) 26(9.95,-4.2) 27(9.95,-2.93) 28(9.95,-1.66) 29(9.95,-0.39) 30(9.95,0.88) 31(9.95,2.15) 32(9.95,3.42) 33(9.95,4.69) 34(9.95,5.96) 35(9.95,7.23) 36(9.95,8.5)
  rect 3.3x3.3 smd mask+0.102: 2(-2.925,-2.85)
  rect 4x4 smd rot 45 mask+0.102: 2(3.05,3.4)
  oval 0.8x2.1 smd: 13(-6.985,-9.95) 14(-5.715,-9.95) 15(-4.445,-9.95) 16(-3.175,-9.95) 17(-1.905,-9.95) 18(-0.635,-9.95) 19(0.635,-9.95) 20(1.905,-9.95) 21(3.175,-9.95) 22(4.445,-9.95) 23(5.715,-9.95) 24(6.985,-9.95)
  oval 1.5x0.8 on Mech3: ""(-9.65,-5.47) ""(-9.65,-4.2) ""(-9.65,-2.93) ""(-9.65,-1.66) ""(-9.65,-0.39) ""(-9.65,0.88) ""(-9.65,2.15) ""(-9.65,3.42) ""(-9.65,4.69) ""(-9.65,5.96) ""(-9.65,7.23) ""(-9.65,8.5) ""(9.65,-5.47) ""(9.65,-4.2) ""(9.65,-2.93) ""(9.65,-1.66) ""(9.65,-0.39) ""(9.65,0.88) ""(9.65,2.15) ""(9.65,3.42) ""(9.65,4.69) ""(9.65,5.96) ""(9.65,7.23) ""(9.65,8.5)
  oval 0.8x1.5 on Mech3: ""(-6.985,-9.65) ""(-5.715,-9.65) ""(-4.445,-9.65) ""(-3.175,-9.65) ""(-1.905,-9.65) ""(-0.635,-9.65) ""(0.635,-9.65) ""(1.905,-9.65) ""(3.175,-9.65) ""(4.445,-9.65) ""(5.715,-9.65) ""(6.985,-9.65)
  round 1 on Mech3 paste-10: ""(-4.072,-5.885) ""(0.323,-1.186) ""(0.348,-3.637) ""(0.539,0.3) ""(1.593,-2.024) ""(2.913,-4.098) ""(4.095,-2.405)
  silkscreen extent -10.2,-10.2 10.2,10.2, body extent -10,-10 10,10, height 2.81
M2.5 [mm]
  round 4.5 / inner round 3 / far side round 4.5 hole 2.6 unplated: 1(0,0)
  silkscreen extent -2.5,-2.5 2.5,2.5
MARK [mm]
  round 1 smd mask+0.5: 1(0,0)
  round 1 smd far side mask+0.5: 2(0,0)
  Top Layer pour cut-out: -1.5,0 -1.386,-0.574 -1.061,-1.061 -0.574,-1.386 0,-1.5 0,-1.5 0.574,-1.386 1.061,-1.061 1.386,-0.574 1.5,0 1.5,0 1.386,0.574 1.061,1.061 0.574,1.386 0,1.5 0,1.5 -0.574,1.386 -1.061,1.061 -1.386,0.574 -1.5,0
  Bottom Layer pour cut-out: -1.5,0 -1.386,-0.574 -1.061,-1.061 -0.574,-1.386 0,-1.5 0,-1.5 0.574,-1.386 1.061,-1.061 1.386,-0.574 1.5,0 1.5,0 1.386,0.574 1.061,1.061 0.574,1.386 0,1.5 0,1.5 -0.574,1.386 -1.061,1.061 -1.386,0.574 -1.5,0
QFN20(0.4)-3X3 [mm]
  rect 1.5x1.5 smd mask+0.051: 0(0,0)
  rect 0.8x0.2 smd mask+0.051: 1(-1.5,0.8)
  oval 0.8x0.2 smd mask+0.051: 2(-1.5,0.4) 3(-1.5,0) 4(-1.5,-0.4) 5(-1.5,-0.8) 11(1.5,-0.8) 12(1.5,-0.4) 13(1.5,0) 14(1.5,0.4) 15(1.5,0.8)
  oval 0.2x0.8 smd mask+0.051: 6(-0.8,-1.5) 7(-0.4,-1.5) 8(0,-1.5) 9(0.4,-1.5) 10(0.8,-1.5) 16(0.8,1.5) 17(0.4,1.5) 18(0,1.5) 19(-0.4,1.5) 20(-0.8,1.5)
  round 0.4 on Mech15: ""(-1.5,0.8)
  silkscreen extent -2.3,-1.65 1.65,1.65, body extent -1.55,-1.55 1.55,1.55, height 0.6
SMA-SMD [mm]
  rect 1.2x4 smd paste-4: 1(0,0)
  rect 1.8x4 smd paste-4: 2(-2.5,0) 3(2.5,0)
  rect 1.8x4 smd far side paste-4: 4(-2.5,0) 5(2.5,0)
  silkscreen extent -3.63,-2.24 3.64,2.22, body extent -3.07,-1.75 3.02,11.75, height 3.5
SMD-1.25-2P [mm]
  rect 2.1x3.1 smd: 0(-3.175,-1.45) 0(3.175,-1.45)
  rect 0.8x1.7 smd: 1(-0.625,1.45) 2(0.625,1.45)
  silkscreen extent -4.46,-3.55 4.48,2.59, body extent -3.62,-3.6 3.62,1.81, height 3.45
SOD-123 [mm]
  rect 1.2x0.9 smd: A(1.7,0) K(-1.7,0)
  silkscreen extent -1.53,-1 1.5,1, body extent -1.85,-0.8 1.85,0.8, height 1.27
SOD-123-FL [mm] "焊盘宽度0.9-1.1"
  rect 1.2x1.2 smd: A(1.7,0) K(-1.7,0)
  silkscreen extent -1.57,-1 1.5,1, body extent -1.8,-0.82 1.8,0.82, height 0.95
SOP-8(1.27)-GND [mm] "5*6"
  rect 3.5x2.6 smd: 0(0.01,0)
  rect 0.55x1.7 smd: 1(-1.905,-2.8)
  oval 0.55x1.7 smd: 2(-0.635,-2.8) 3(0.635,-2.8) 4(1.905,-2.8) 5(1.905,2.8) 6(0.635,2.8) 7(-0.635,2.8) 8(-1.905,2.8)
  round 0.5 on Mech15 mask+0.3: ""(-1.92,-2.553)
  silkscreen extent -2.9,-2.88 2.54,1.8, body extent -2.52,-3.13 2.54,3.13, height 1.76
SOT-23-3G [mm]
  rect 1x0.8 smd: D(-1.05,0) G(1.05,-0.95) S(1.05,0.95)
  rect 0.55x0.5 on Mech1: ""(-1.025,0) ""(1.025,-0.95) ""(1.025,0.95)
  silkscreen extent -1.19,-1.77 1.25,1.77, body extent -1.41,-1.45 1.41,1.45, height 1.22
SOT-23-3P [mm]
  rect 1x0.8 smd: 1(1.05,-0.95) 2(1.05,0.95) 3(-1.05,0)
  rect 0.55x0.5 on Mech3: ""(-1.025,0) ""(1.025,-0.95) ""(1.025,0.95)
  silkscreen extent -1.19,-1.77 1.25,1.77, body extent -1.41,-1.45 1.41,1.45, height 1.22
SOT-23-5P [mm]
  rect 1.1x0.508 smd: 1(1.35,-0.95) 2(1.35,0) 3(1.35,0.95) 4(-1.35,0.95) 5(-1.35,-0.95)
  silkscreen extent -1.3,-1.81 2.06,1.79, body extent -1.5,-1.5 1.5,1.5, height 1.3
SOT-23-6P [mm]
  rect 0.9x0.5 smd: 1(1.25,-0.95)
  oval 0.9x0.5 smd: 2(1.25,0) 3(1.25,0.95) 4(-1.25,0.95) 5(-1.25,0) 6(-1.25,-0.95)
  silkscreen extent -0.75,-1.4 2.34,1.4, body extent -1.4,-1.45 1.4,1.45, height 1.45
SOT-563-6 [mm]
  rect 0.25x0.55 smd mask+0.05: 1(-0.5,-0.8) 2(0,-0.8) 3(0.5,-0.8) 5(0,0.8)
  rect 0.25x0.55 smd mask+0.051: 4(0.5,0.8) 6(-0.5,0.8)
  rect 0.22x0.25 on Mech3 paste+0 mask+0.102: ""(-0.5,-0.725) ""(-0.5,0.725) ""(0,-0.725) ""(0.5,0.725) ""(0.5,-0.725)
  silkscreen extent -0.9,-1.49 0.9,0.6, body extent -0.8,-0.81 0.8,0.81, height 0.59
SOT-723-3A [mm]
  rect 0.4x0.4 smd: B(0.5,-0.4) C(-0.5,0) E(0.5,0.4)
  silkscreen extent -0.52,-0.65 0.07,0.65, body extent -0.5,-0.63 0.55,0.63, height 0.45
SW-4.2X3.2-4P-S [mm]
  rect 1.2x0.65 smd mask+0.05: 1(-2.075,1.075) 2(2.075,1.075) 3(-2.075,-1.075) 4(2.075,-1.075)
  silkscreen extent -2.3,-1.8 2.3,1.8, body extent -2.6,-1.68 2.6,1.68, height 2.5
TEST#1 [mm]
  round 1.2 smd paste-10: 1(0,0)
TEST#2 [mm]
  round 1 smd paste-10 mask+0.064: 1(0,0)
TSSOP-16(0.65)-5X6.6 [mm]
  rect 0.3x1.25 smd: 1(-2.275,-2.975)
  oval 0.3x1.25 smd: 2(-1.625,-2.975) 3(-0.975,-2.975) 4(-0.325,-2.975) 5(0.325,-2.975) 6(0.975,-2.975) 7(1.625,-2.975) 8(2.275,-2.975) 9(2.275,2.975) 10(1.625,2.975) 11(0.975,2.975) 12(0.325,2.975) 13(-0.325,2.975) 14(-0.975,2.975) 15(-1.625,2.975) 16(-2.275,2.975)
  oval 0.25x0.75 on Mech3: ""(-2.275,-2.825) ""(-2.275,2.825) ""(-1.625,-2.825) ""(-1.625,2.825) ""(-0.975,-2.825) ""(-0.975,2.825) ""(-0.325,2.825) ""(-0.325,-2.825) ""(0.325,-2.825) ""(0.325,2.825) ""(0.975,-2.825) ""(0.975,2.825) ""(1.625,-2.825) ""(1.625,2.825) ""(2.275,-2.825) ""(2.275,2.825)
  round 0.5 on Mech15: ""(-2.275,-2.975)
  silkscreen extent -3.14,-3.53 2.7,2.2, body extent -2.5,-3.2 2.5,3.2, height 2
UDFN2(1610) [mm]
  rect 0.58x1 smd mask+0.076: A(0.56,0) K(-0.56,0)
  rect 0.4x0.88 on Mech3: ""(-0.55,0) ""(0.55,0)
  silkscreen extent -1.15,-0.7 1.05,0.7, body extent -0.8,-0.5 0.8,0.5, height 0.59
USB-TYPEC-U22401-1 [mm]
  rect 0.3x1.1 smd mask+0.05: A1(-3.35,3.65) A4(-2.55,3.65) A5(-1.25,3.65) A6(-0.25,3.65) A7(0.25,3.65) A8(1.25,3.65) A9(2.55,3.65) A12(3.35,3.65) B1(3.05,3.65) B4(2.25,3.65) B5(1.75,3.65) B6(0.75,3.65) B7(-0.75,3.65) B8(-1.75,3.65) B9(-2.25,3.65) B12(-3.05,3.65)
  oval 1x1.8 hole 0.6 slot 1.4 at 90 deg paste-2539.97: H1(5.62,2.5) H2(-5.62,2.5)
  oval 1x2.2 hole 0.6 slot 1.8 at 90 deg paste-2539.97: H3(-5.62,-1.5) H4(5.62,-1.5)
  oval 1x2.2 on Top Paste paste+0: ""(-5.62,-1.5) ""(5.62,-1.5)
  oval 1x1.8 on Top Paste paste+0: ""(-5.62,2.5) ""(5.62,2.5)
  Keep-Out Layer lines w0.198: -4.62,-3 -4.62,3.1 ; -4.12,3.1 4.12,3.1 ; 4.62,-3 4.62,3.1
  Keep-Out Layer lines w0.2: -4.62,3.1 cw(c-4.37,3.1) -4.12,3.1 ; 4.12,3.1 cw(c4.37,3.1) 4.62,3.1
  silkscreen extent -5.97,-3.9 5.97,3.8, body extent -5.77,-3.61 5.77,3.59, height 1.08
"White oil-9X9" [mm] "二维码白油块"
  round 0.3 on Mech3: 29(0,0)
  silkscreen extent -4.5,-4.5 4.5,4.5
XDFN4-1X1 [mm]
  rect 0.5x0.5 smd rot 45 mask+0.05: 0(0,0)
  round 0.2 smd mask+0.05: 1(0.325,0.435) 2(-0.325,0.435) 3(-0.325,-0.435) 4(0.325,-0.435)
  round 0.2 on Mech15: ""(0.325,0.505)
  Top Layer region: -0.175,-0.42 -0.375,-0.22 -0.475,-0.22 -0.475,-0.65 -0.175,-0.65
  Top Layer region: 0.175,0.42 0.375,0.22 0.475,0.22 0.475,0.65 0.175,0.65
  Top Layer region: 0.175,-0.42 0.375,-0.22 0.475,-0.22 0.475,-0.65 0.175,-0.65
  Top Layer region: -0.175,0.42 -0.375,0.22 -0.475,0.22 -0.475,0.65 -0.175,0.65
  silkscreen extent -0.6,-0.6 0.78,0.73
麦克风MSM381ACT001 [mm]
  rect 0.7x0.7 smd: 1(0.55,1) 2(0.55,-1) 3(-0.55,-1) 4(-0.55,1)
  silkscreen extent -1.06,-1.53 1.12,1.55, body extent -0.93,-1.37 0.93,1.38, height 1.05

## Part data
ANT1: library part 1416000904, "180°/SMA", 产品型号=SLE-100010012-C01, 原厂品牌=森岭, 品名=射频接头, 存货编码=1416000904, 封装=其他, 物料状态=优选
ANT2: library part 1410029035, "2875MHz/2450MHz", 产品型号=LA8010H2450-A19, 原厂品牌=嘉兴佳利, 品名=陶瓷天线, 存货编码=1410029035, 封装=SMD, 物料状态=限用
C1 C10 C16 C83: library part 1405002483, "4.7uF/16V/20%/X5R", 产品型号=CL05A475MO5NUNC, 原厂品牌=SAMSUNG电容, 存货编码=1405002483, 封装=0402
  C1 C16 C83: 品名=陶瓷电容
  C10: 器件名称=陶瓷电容
C2 C8 C11 C19 C23 C28 C32 C33 C34 C66 C67 C68 C85 C89: library part 1405000464, "0.1uF/16V/10%/X7R", 产品型号=CL05B104KO5NNNC, 存货编码=1405000464, 封装=0402
  C2 C19 C23 C28 C32 C33 C34 C66 C67 C68 C85 C89: 原厂品牌=SAMSUNG电容, 品名=陶瓷电容
  C8: 原厂品牌=SAMSUNG电容, 器件名称=陶瓷电容
  C11: 原厂品牌=SAMSUNG, 品名=陶瓷电容, 物料状态=优选
C9: library part 1405002139, "10nF/50V/5%/X7R", 产品型号=CC0402JRX7R9BB103, 原厂品牌=YAGEO, 器件名称=陶瓷电容, 存货编码=1405002139, 封装=0402
C12: library part 1405000041, "0.1uF/16V/10%/X7R", 产品型号=CC0402KRX7R7BB104, 原厂品牌=YAGEO, 器件名称=陶瓷电容, 存货编码=1405000041, 封装=0402
C13: library part 1405001560, "20pF/50V/5%/C0G", 产品型号=V200J0402C0G500NBT, 原厂品牌=微容VIIYONG, 品名=陶瓷电容, 存货编码=1405001560, 封装=0402, 物料状态=优选
C14: library part 1405001346, "22uF/10V/20%/X5R", 产品型号=CL10A226MP8NUN#, 原厂品牌=SAMSUNG电容, 品名=陶瓷电容, 存货编码=1405001346, 封装=0603
C15 C78 C80 C81 C86: library part 1405001308, "10uF/10V/20%/X5R", 品名=陶瓷电容, 存货编码=1405001308, 封装=0402
  C15 C81: 产品型号=CL05A106MP5NUNC, 原厂品牌=SAMSUNG电容
  C78 C80: 产品型号=10uF/10V, 原厂品牌=三星, 物料状态=优选
  C86: 产品型号=CL05A106MP5NUNC, 原厂品牌=SAMSUNG电容, 物料状态=优选
C17 C22 C24 C25 C29 C31 C38 C39 C41 C42 C43 C59 C74 C75 C76 C77 C82 C84 C88 C90: library part 1405004038, "1uF/16V/10%/X5R", 产品型号=CL05A105KO5NNNC, 原厂品牌=SAMSUNG电容, 品名=陶瓷电容, 存货编码=1405004038, 封装=0402
C20 C21 C26 C27: library part 1405000291, "33pF/50V/5%/C0G", 产品型号=CC0402JRNPO9BN330, 原厂品牌=YAGEO, 品名=陶瓷电容, 存货编码=1405000291, 封装=0402, 物料状态=优选
C30: library part 1405005232, "10nF/16V/10%/X7R", 产品型号=V103K0402X7R160NBT, 原厂品牌=微容VIIYONG, 品名=陶瓷电容, 存货编码=1405005232, 封装=0402, 物料状态=优选
C35 C36 C45 C49 C53: library part 1405001497, "2.2uF/6.3V/20%/X5R", 产品型号=CL05A225MQ5NNNC, 原厂品牌=SAMSUNG电容, 品名=陶瓷电容, 存货编码=1405001497, 封装=0402, 物料状态=优选
C37 C40 C50 C51 C52 C54 C56 C69 C70 C71 C79: library part 1405001320, "22pF/50V/5%/C0G", 产品型号=V220J0402C0G500NBT, 原厂品牌=微容VIIYONG, 品名=陶瓷电容, 存货编码=1405001320, 封装=0402, 物料状态=优选
C44 C46 C47 C48 C55 C60 C61 C87 C92: library part 1405001287, "0.1uF/16V/10%/X7R", 产品型号=V104K0402X7R160NBT, 原厂品牌=微容VIIYONG, 品名=陶瓷电容, 存货编码=1405001287, 封装=0402, 物料状态=优选
C57 C58: library part 1405001368, "0.47uF/10V/10%/X5R", 产品型号=V474K0402X5R100NNT, 原厂品牌=微容VIIYONG, 品名=陶瓷电容, 存货编码=1405001368, 封装=0402, 物料状态=优选
C62: library part 1405001380, "33pF/50V/5%/C0G", 产品型号=V330J0402C0G500NBT, 原厂品牌=微容VIIYONG, 品名=陶瓷电容, 存货编码=1405001380, 封装=0402, 物料状态=优选
C63: library part 1405001303, "15pF/50V/5%/C0G", 产品型号=V150J0402C0G500NBT, 原厂品牌=微容VIIYONG, 品名=陶瓷电容, 存货编码=1405001303, 封装=0402, 物料状态=优选
C64 C65 C91: library part 1405001283, "1nF/50V/5%/C0G", 产品型号=V102J0402C0G500NBT, 原厂品牌=微容VIIYONG, 品名=陶瓷电容, 存货编码=1405001283, 封装=0402, 物料状态=优选
CON2: library part 1416004328, "TYPE C", 产品型号=MUP-U22401-1, 原厂品牌=德海威, 品名=USB连接器, 存货编码=1416004328, 封装=SMD, 物料状态=优选
CON3 CON4: library part 1416001814, "1.25mm/2PIN", 产品型号=1.25mm/2PIN, 原厂品牌=肯耐特, 品名=线对板连接器, 存货编码=1416001814, 封装=SMD, 物料状态=优选
CON5: library part 1416003013, "1.25mm/2PIN", 产品型号=CNT-W125-1*2-TSM, 原厂品牌=肯耐特, 品名=线对板连接器, 存货编码=1416003013, 封装=SMD, 物料状态=优选
CON6: library part 1416002856, "0.50mm/20PIN", 产品型号=60030-2001-5002, 原厂品牌=新富尔, 品名=FFC，FPC连接器, 存货编码=1416002856, 封装=SMD, 物料状态=优选
D1 D5: library part 1409001653, "40V/3A", 产品型号=S34, 原厂品牌=YJ, 品名=肖特基二极管, 存货编码=1409001653, 封装=SOD-123FL, 物料状态=优选
D2: library part 1409003028, "单向/4.5V/2160W", 产品型号=WS4.5DPVL, 原厂品牌=WAYON（维安）, 品名=TVS管, 存货编码=1409003028, 封装=DFN1610-2L
D3: library part 1409004319, "1通道", 产品型号=WS6.3DPX, 原厂品牌=WAYON（维安）, 品名=ESD保护器件, 存货编码=1409004319, 封装=DFN1610-2L, 物料状态=优选
D6: library part 1409000809, "5.6V/0.5W", 产品型号=LBZT52C5V6T1G, 原厂品牌=LRC, 品名=稳压二极管, 存货编码=1409000809, 封装=SOD-123, 物料状态=优选
D7 D9 D11 D12: library part 1409004678, "1通道/5V/6.5V/40W/0.32pF", 产品型号=BUU05CN10, 原厂品牌="BF TECH", 品名=ESD保护器件, 存货编码=1409004678, 封装=DFN1006-2L, 物料状态=优选
D8: library part 1409004149, "1通道", 产品型号=WS05DPF-BH, 原厂品牌=WAYON（维安）, 品名=ESD保护器件, 存货编码=1409004149, 封装=DFN1006-2L, 物料状态=优选
K1 K2: library part 1414000735, "4.2*3.2*2.5mm", 产品型号=TS3443-0253B, 原厂品牌=苏州菀钛, 品名=轻触开关, 存货编码=1414000735, 封装=SMD, 物料状态=客定
K3 K4 K5 K6 K7: library part 1414000145, "7.8*3.5*3.5mm", 存货编码=1414000145
L1: library part 1404002237, "90Ω/0.1A/3.8Ω", 产品型号=DLM0NSM900HY2#, 原厂品牌=MURATA, 品名=扼流圈（共模）, 存货编码=1404002237, 封装=SMD, 项目类型=OEM
L2: library part 1404002926, 产品型号=SKFB201208PA2R2M, 原厂品牌=三体Scientic, 品名=功率电感, 存货编码=1404002926, 封装=0805, 物料状态=试用
LED1: library part 1409000426, "红/25mA", 产品型号=19-213SURC-S530-A2-TR8, 原厂品牌=EVERLIGHT, 器件名称=发光二极管, 存货编码=1409000426, 封装=0603
LED2 LED3: library part 1409000351, "绿/25mA/112-285mcd", 产品型号=19-217/GHC-YR1S2/6T, 原厂品牌=EVERLIGHT, 品名=LED发光二极管, 存货编码=1409000351, 封装=0603, 物料状态=优选
Q1: library part 1412000739, "PMOS/30V/4.2A", 产品型号=CJ3401, 原厂品牌=CJ, 品名=MOS管, 存货编码=1412000739, 封装=SOT-23, 物料状态=优选
Q3 Q4 Q5: library part 1412002731, "NPN/100mA/50V/100mW", 产品型号=DTC143ZM, 原厂品牌=CJ, 品名=三极管, 存货编码=1412002731, 封装=SOT-723, 物料状态=优选
R1 R2 R9 R14 R16 R17 R22 R23 R27 R30 R32 R38 R39 R40 R41 R42 R43 R44 R45 R46 R47 R48 R49 R51 R52 R53 R54 R55 R56 R57 R58 R59 R60 R61 R62 R64 R65 R67 R68 R69 R70 R71 R74 R76 R83 R84 R94 R98 R99 R100 R101 R102 R104 R105 R106 R107 R108 R109 R110 R111 R113: library part 1408000124, 产品型号=0402WGF0000TCE, 原厂品牌=Uniohm, 品名=厚膜贴片电阻, 存货编码=1408000124, 封装=0402, 物料状态=优选
R3 R4: library part 1408001245, "5.1K/1%/100PPM", 产品型号=RC0402FR-075K1L, 原厂品牌=YAGEO, 品名=厚膜贴片电阻, 存货编码=1408001245, 封装=0402
R5: library part 1408001200, 产品型号=0402WGF5102TCE, 原厂品牌=Uniohm, 品名=厚膜贴片电阻, 存货编码=1408001200, 封装=0402, 物料状态=优选
R8: library part 1408000126, 产品型号=0402WGF1003TCE, 原厂品牌=Uniohm, 品名=厚膜贴片电阻, 存货编码=1408000126, 封装=0402, 物料状态=优选
R10 R18 R19 R21: library part 1408006136, "620R/5%", 产品型号=0402WGJ0621TCE, 原厂品牌=Uniohm, 品名=厚膜贴片电阻, 存货编码=1408006136, 封装=0402, 物料状态=限用
R11 R112: library part 1408000783, "22KΩ/1%", 产品型号=0402WGF2202TCE, 原厂品牌=Uniohm, 品名=厚膜贴片电阻, 存货编码=1408000783, 封装=0402, 物料状态=优选
R12: library part 1408001062, 产品型号=RC0402FR-07220RL, 原厂品牌=YAGEO, 品名=厚膜贴片电阻, 存货编码=1408001062, 封装=0402, 物料状态=优选
R13 R63 R66 R72 R88 R90 R103: library part 1408000487, "0Ω/1%", 原厂品牌=Uniohm, 品名=厚膜贴片电阻, 存货编码=1408000487, 封装=0805, 物料状态=优选
  R13 R66 R72 R88: 产品型号=0R
  R63 R90: 产品型号=NC
  R103: 产品型号=0Ω/1%
R15 R20 R87 R89: library part 1408000526, 产品型号=0402WGJ0103TCE, 原厂品牌=Uniohm, 品名=厚膜贴片电阻, 存货编码=1408000526, 封装=0402, 物料状态=优选
R24 R25: library part 1408001205, "68KΩ/1%", 产品型号=RC0402FR-0768KL, 原厂品牌=YAGEO, 品名=厚膜贴片电阻, 存货编码=1408001205, 封装=0402, 物料状态=优选
R26: library part 1408000585, 产品型号=0402WGF2702TCE, 原厂品牌=Uniohm, 品名=厚膜贴片电阻, 存货编码=1408000585, 封装=0402, 物料状态=优选
R28 R35 R37 R50 R75 R77 R79 R81 R96: library part 1408000127, 产品型号=0402WGF1002TCE, 原厂品牌=Uniohm, 品名=厚膜贴片电阻, 存货编码=1408000127, 封装=0402, 物料状态=优选
R29: library part 1408001016, 产品型号=0402WGF3301TCE, 原厂品牌=Uniohm, 品名=厚膜贴片电阻, 存货编码=1408001016, 封装=0402, 物料状态=优选
R31: library part 1408001245, 产品型号=RC0402FR-075K1L, 原厂品牌=YAGEO, 品名=厚膜贴片电阻, 存货编码=1408001245, 封装=0402, 物料状态=优选
R33 R34 R91 R93: library part 1408000457, "2.2KΩ/5%", 产品型号=0402WGJ0222TCE, 原厂品牌=Uniohm, 品名=厚膜贴片电阻, 存货编码=1408000457, 封装=0402, 物料状态=优选
R36 R86: library part 1408000535, "1KΩ/5%", 产品型号=620R, 原厂品牌=Uniohm, 品名=厚膜贴片电阻, 存货编码=1408000535, 封装=0402, 物料状态=优选
R73 R95: library part 1408001205, 产品型号=RC0402FR-0768KL, 原厂品牌=YAGEO, 品名=厚膜贴片电阻, 存货编码=1408001205, 封装=0402, 物料状态=优选
R78 R80 R82: library part 1408000127, "10KΩ/1%", 产品型号=0402WGF1002TCE, 原厂品牌=Uniohm, 品名=厚膜贴片电阻, 存货编码=1408000127, 封装=0402, 物料状态=优选
R85: library part 1408000223, "2KΩ/5%", 产品型号=2K, 原厂品牌=Uniohm, 品名=厚膜贴片电阻, 存货编码=1408000223, 封装=0402, 物料状态=优选
R92: library part 1408006269, "220Ω/5%", 产品型号=0402WGJ0221TCE, 原厂品牌=Uniohm, 品名=厚膜贴片电阻, 存货编码=1408006269, 封装=0402, 物料状态=优选
R97: library part 1408001377, "4.7Ω/1%", 产品型号=RC0402FR-074R7L, 原厂品牌=YAGEO, 品名=厚膜贴片电阻, 存货编码=1408001377, 封装=0402, 物料状态=优选
R114 R115: library part 1408000713, 产品型号=0402WGF1004TCE, 原厂品牌=Uniohm, 品名=厚膜贴片电阻, 存货编码=1408000713, 封装=0402, 物料状态=优选
TP1 TP2 TP3 TP4 TP5 TP6 TP7: library part MARK, 产品型号=MARK
U3: library part 1410003301, "USB保护芯片", 产品型号=USBLC6-2SC6, 原厂品牌=ST, 品名=ESD保护二极管, 存货编码=1410003301, 封装=SOT-23-6
U5: library part 1407003557, "1.8V/250mA/1.7-7.5V", 产品型号=SGM2034-1.8YN3G/TR, 原厂品牌=圣邦微, 品名=低压差线性稳压器, 存货编码=1407003557, 封装=SOT-23-3, 物料状态=优选
U6: library part 1407001780, "3.3V/500mA/2.5-5.5V", 产品型号=SGM2028-3.3YN5G/TR, 原厂品牌=SGMICRO, 品名=低压差线性稳压器, 存货编码=1407001780, 封装=SOT-23-5, 物料状态=优选
U7: "QFN20-3*3mm"
U8: library part 1407000458, "-/1A", 产品型号=TP4056, 原厂品牌=南京拓微, 品名=电池管理IC, 存货编码=1407000458, 封装=SOP8, 物料状态=优选
U9: library part SI-MIC, "1406000322"
U10: library part 1407004220, "2.8V/300mA/1.6-6V", 产品型号=ETA5053V280DF1E, 原厂品牌=钰泰科技, 品名=低压差线性稳压器, 存货编码=1407004220, 封装=DFN4, 物料状态=优选
U11: library part TCA9554PWR, "IO扩展芯片"
H300 H301 H302 H303 TP_LDO1 TP_VBAT1: 产品型号=TP
MK1: 产品型号=MARK
Oil1: 产品型号=Oil
R6 R7: 产品型号=NC

## Via types
v1: diameter 0.5, hole 0.3, Top Layer to Bottom Layer, tented both sides, 804 vias

## Nets (pads, with @x,y where several pads share a name; then routed paths per layer and width w, separated by ;. In a path a pad name is that pad's centre, name@x,y a point inside that pad or via, vN(x,y) a via of type N, cw(c..) or ccw(c..) an arc to the next point about the centre after c; other vN are vias at no path point)
3.3V_8311: C61.2 R14.2 R53.1 R55.2 R92.2 TP_LDO1.1 U9.1 | length 51.4
  Top Layer w0.305: v1@-45.344,48.508 R92.2@-42.797,48.508
  Top Layer w0.381: v1(-50.929,42.91) -51.619,42.91 ; U9.1@-50.579,45.241 -51.619,44.201 -51.619,42.91 ; v1(-49.549,34.235) -49.56,34.224 -50.379,34.224 R14.2@-50.39,34.213 -50.39,34.336 -52.645,36.591 -52.645,41.762 -51.619,42.787 -51.619,42.91 ; R53.1@-37.296,37.347 -37.24,37.403 -36.698,37.403 v1(-36.676,37.426) ; v1(-35.295,47.992) -35.29,47.986 -35.29,47.285 R55.2@-35.284,47.28
  VCC w0.305: v1(-50.929,42.91) -50.929,42.925 v1(-45.345,48.509)
  VCC w0.381: v1(-36.676,37.426) -36.654,37.426 -35.949,38.131 -35.949,41.854 -35.295,42.508 v1(-35.295,47.992)
  Bottom Layer w0.381: v1(-49.549,34.235) -49.041,34.743 TP_LDO1.1@-49.041,34.997 ; TP_LDO1.1@-48.787,34.997 -47.157,36.627 -37.442,36.627 -36.676,37.394 v1(-36.676,37.426)
A0: R77.2 R78.1 U11.1 | length 5.6
  Top Layer w0.203: R77.2@-44.777,20.09 -44.777,20.586 -43.857,21.507 -42.384,21.507 -42.336,21.555 -42.336,22.58 -42.661,22.905 R78.1@-43.423,22.905
A1: R79.2 R80.1 U11.2 | length 6.7
  Top Layer w0.203: R79.2@-43.76,19.956 -43.76,20.795 -43.486,21.069 -41.829,21.069 -41.686,21.212 U11.2@-41.686,22.03 -41.705,22.049 -41.705,22.592 -42.973,23.86 -43.378,23.86 R80.1@-43.423,23.905
A2: R81.2 R82.1 U11.3 | length 7.2
  Top Layer w0.203: R82.1@-43.423,24.905 -41.036,22.518 U11.3@-41.036,22.03 -41.036,21.199 -41.642,20.594 -42.616,20.594 -42.735,20.475 R81.2@-42.735,19.956
AM36_USBD_N: L1.1 M1.15 | length 58.1
  Top Layer w0.241: v1(-31.625,21.853) -31.625,21.827 -31.871,21.582 -31.871,19.982 -28.007,16.117 -27.293,16.117 -26.81,15.634 -26.81,14.955 L1.1@-26.707,14.851 ; M1.15@-29.445,62.05 -29.418,62.023 -29.418,60.732 v1(-29.392,60.706)
  VCC w0.241: v1(-31.625,21.853) -31.877,22.104 -31.877,51.865 -34.989,54.976 -34.989,59.801 -33.183,61.606 -29.13,61.606 -28.989,61.465 -28.989,61.104 -29.387,60.706 v1(-29.392,60.706)
AM36_USBD_P: L1.4 M1.16 | length 59.4
  Top Layer w0.241: v1(-32.562,21.854) -32.264,21.557 -32.264,19.818 -28.17,15.724 -27.456,15.724 -27.204,15.471 -27.204,14.955 L1.4@-27.307,14.851 ; v1(-28.193,60.697) -28.184,60.706 -28.184,62.041 M1.16@-28.175,62.05
  VCC w0.241: v1(-32.562,21.854) -32.271,22.145 -32.271,51.702 -35.267,54.698 -35.382,54.813 -35.382,59.964 -33.346,62 -28.967,62 -28.595,61.628 -28.595,61.104 -28.193,60.701 v1(-28.193,60.697)